# EAGLE board matrix_io_stencil (EAGLE 9.5.2), part 1 of 3
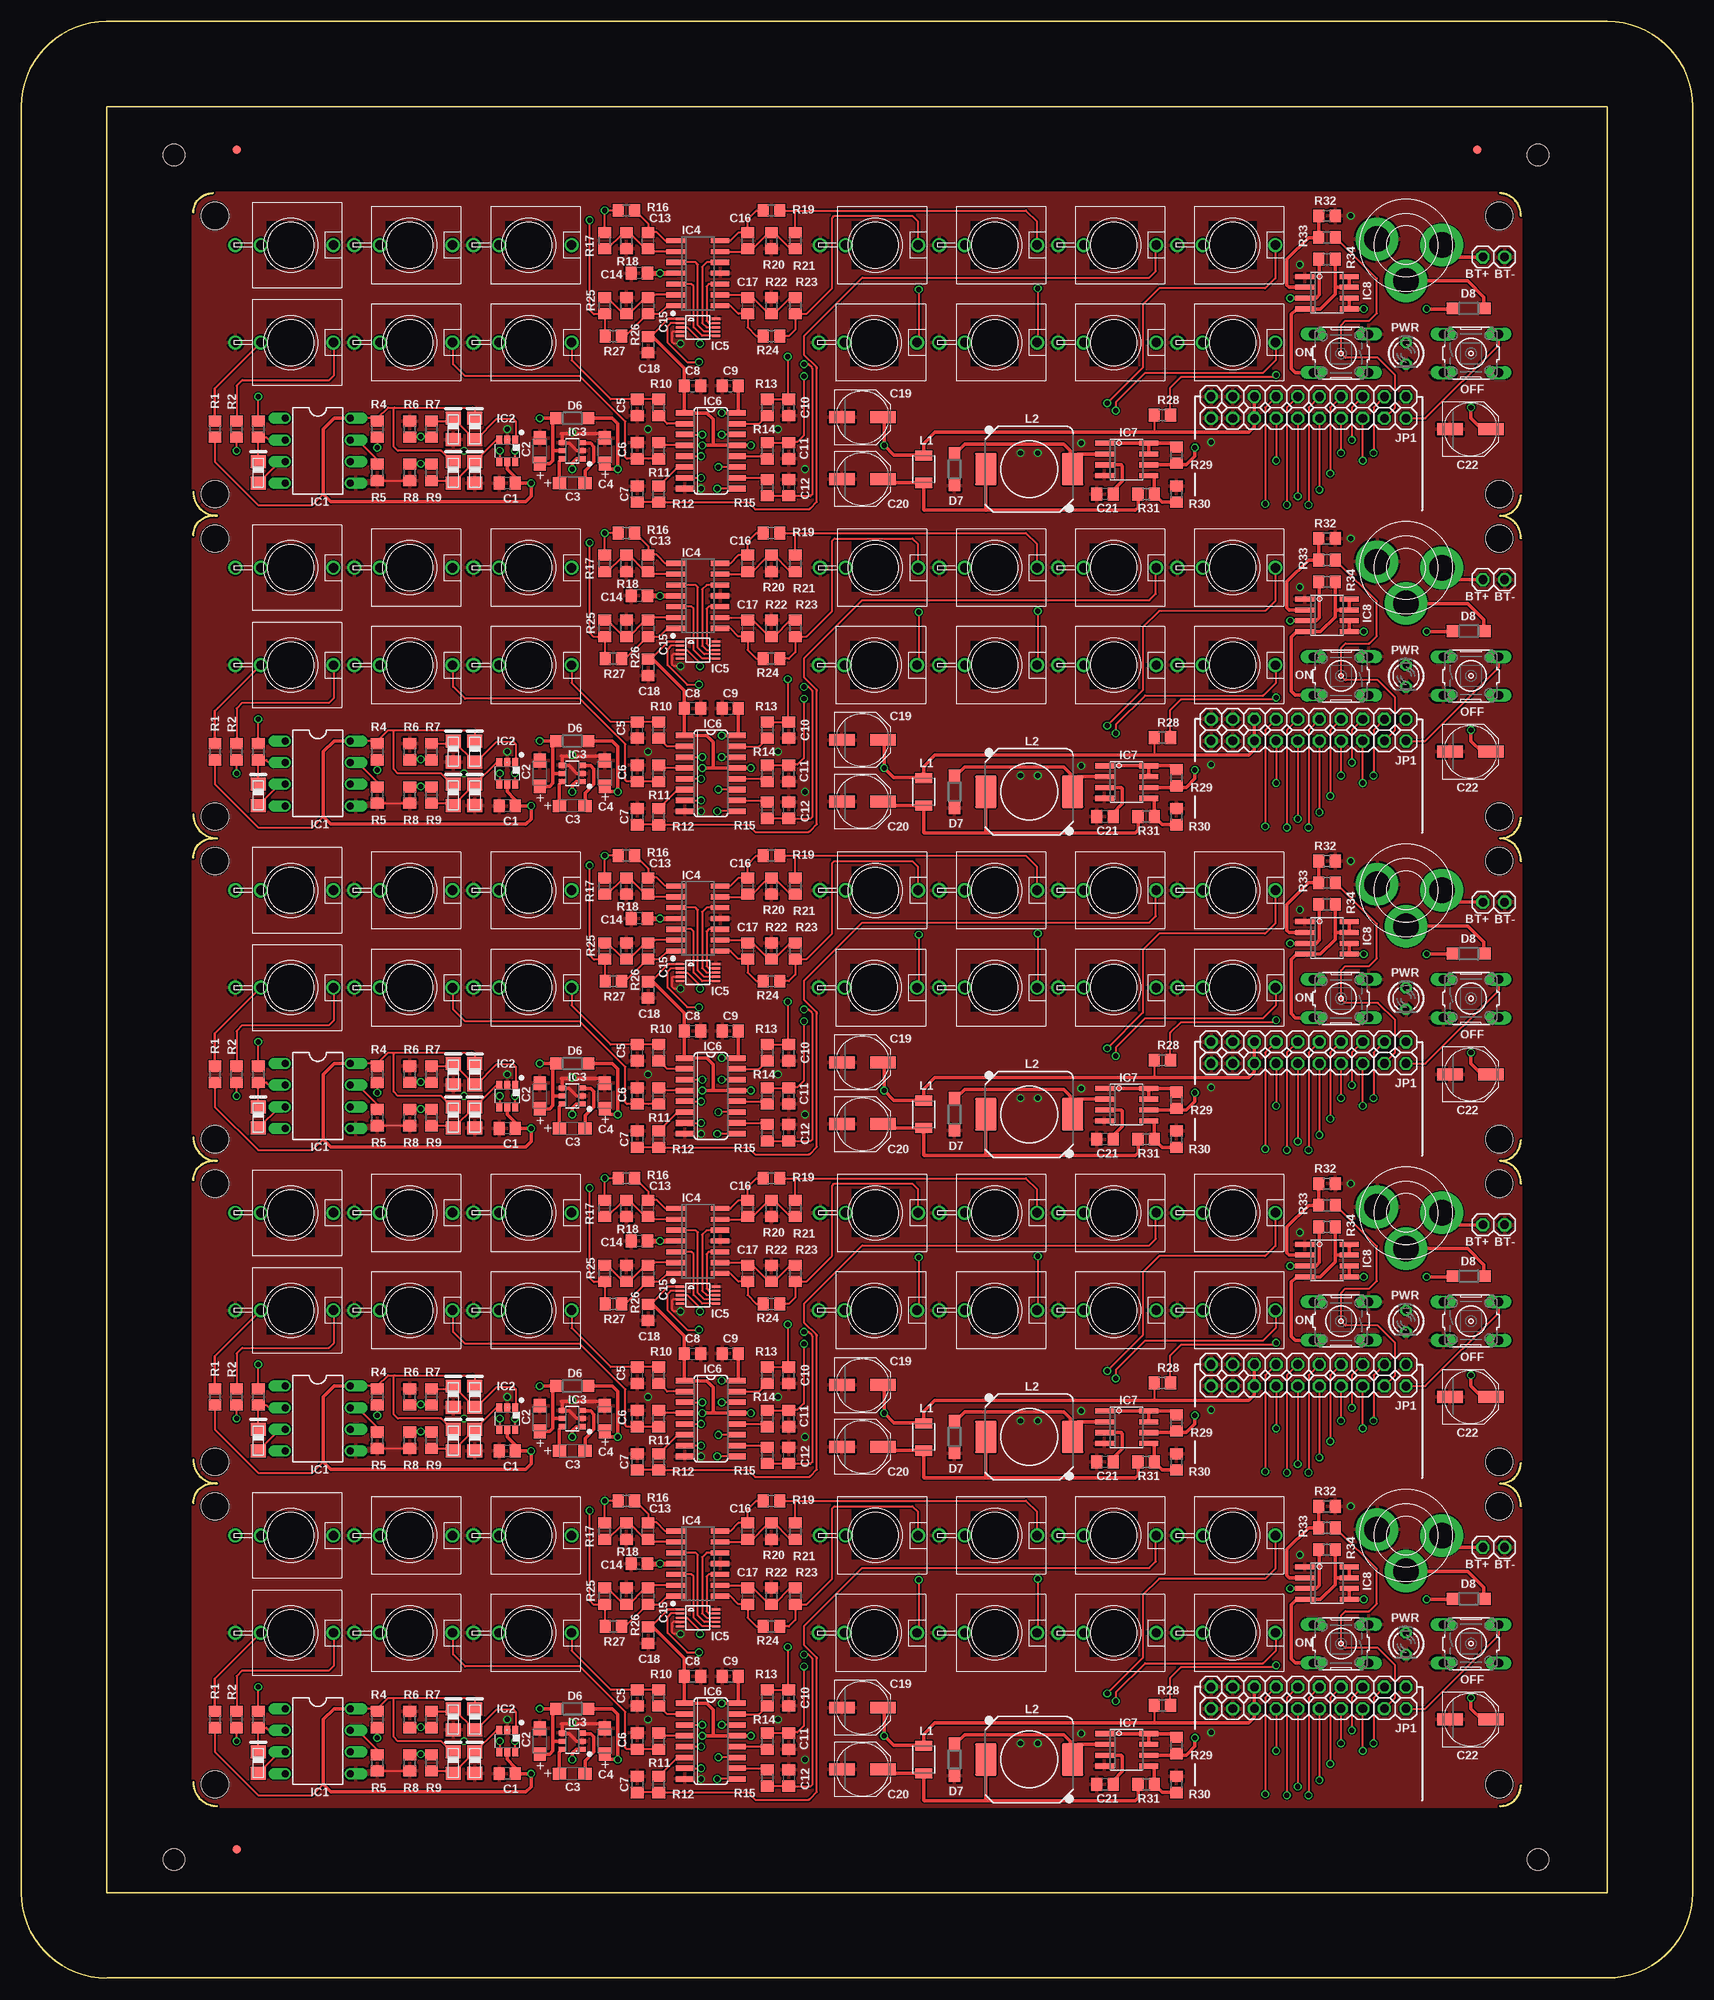
[diagram p0: board, top side]
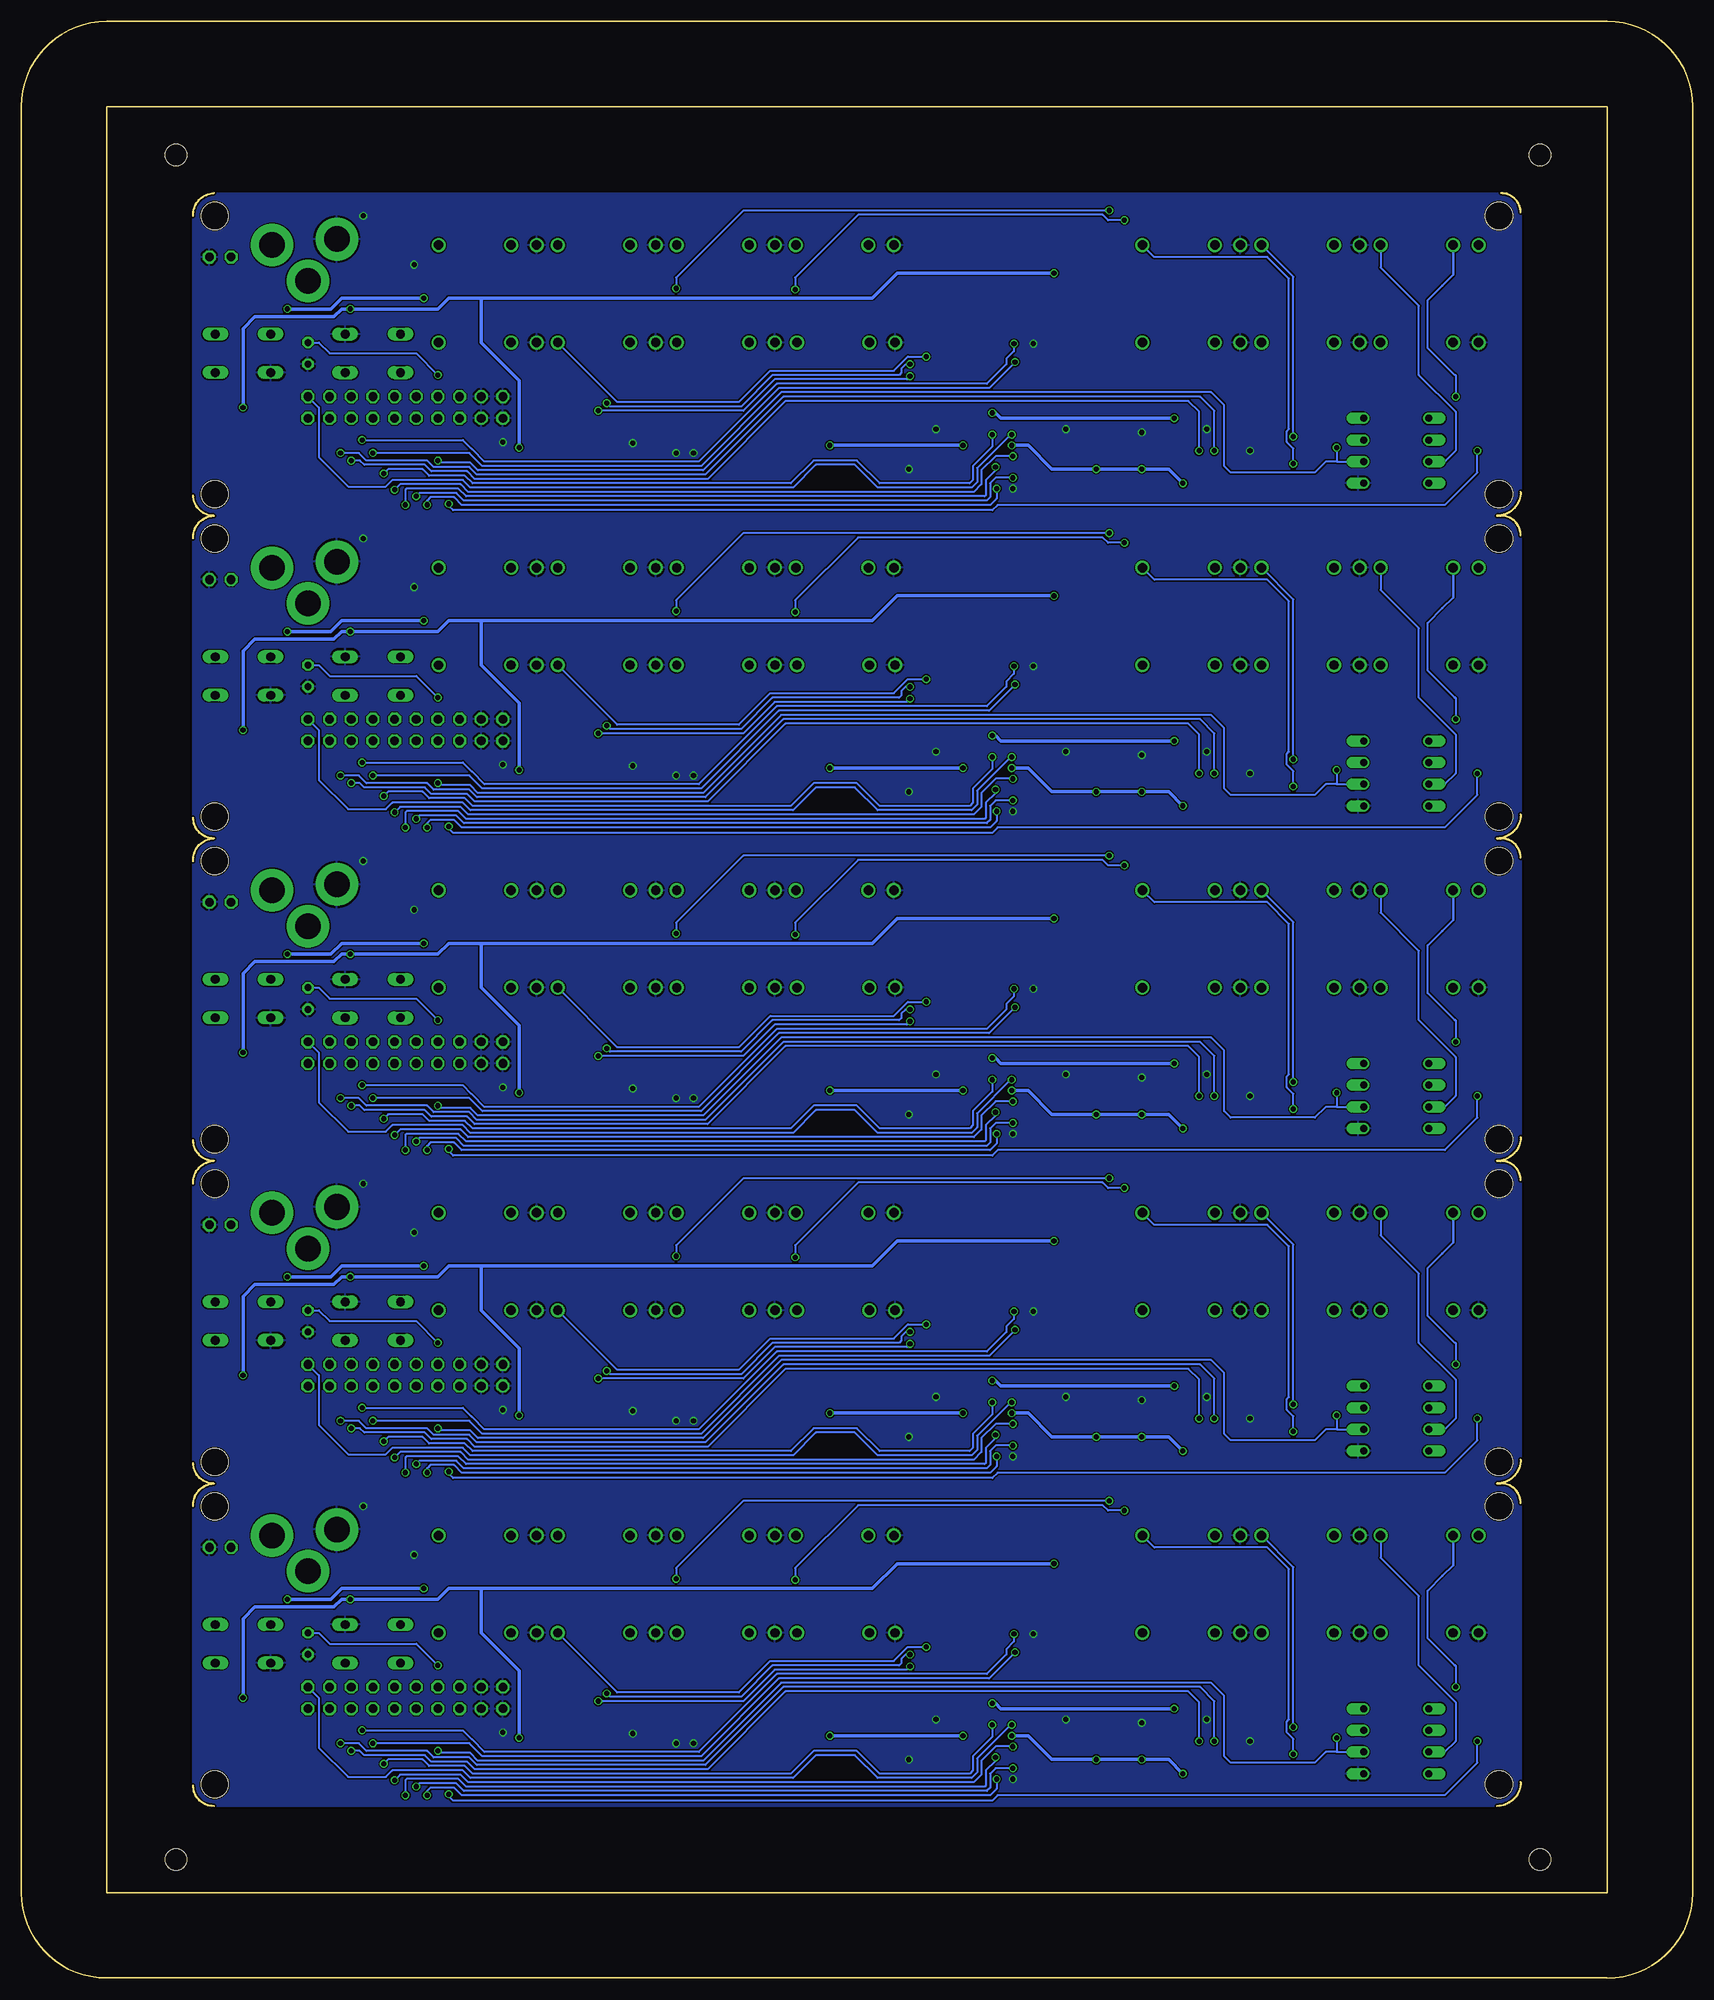
[diagram p1: board, bottom side, seen from below]

Size 196.03 x 229.58 mm. Coordinates in mm from the lower left corner, seen from the top.
Outline: 20.17,22.98 arc90 22.96,20.19
Outline: 173.46,20.19 arc90 175.87,22.6
Outline: 175.87,55.37 arc90 173.46,58.04 arc90 175.87,60.45
Outline: 20.17,55.75 arc-90 22.46,58.04 22.96,58.04 arc-90 20.17,60.83
Outline: 175.87,93.22 arc90 173.46,95.88 arc90 175.87,98.3
Outline: 20.17,93.6 arc-90 22.46,95.88 22.96,95.88 arc-90 20.17,98.68
Outline: 175.87,131.06 arc90 173.46,133.73 arc90 175.87,136.14
Outline: 20.17,131.44 arc-90 22.46,133.73 22.96,133.73 arc-90 20.17,136.52
Outline: 175.87,168.91 arc90 173.46,171.57 arc90 175.87,173.99
Outline: 20.17,169.29 arc-90 22.46,171.57 22.96,171.57 arc-90 20.17,174.37
Outline: 175.87,206.75 arc90 173.46,209.42
Outline: 20.17,207.13 arc-90 22.46,209.42
Outline: 196.03,219.58 196.03,10.03
Outline: 10.01,0.03 186.03,0.03
Outline: 10.01,229.58 186.03,229.58
Outline: 0.01,219.58 0.01,10.03
Outline: 0,219.59 0.01,219.6 arc-90 9.99,229.58
Outline: 186.04,229.58 arc-90 196.02,219.6
Outline: 196.03,10.01 arc-90 186.05,0.03
Outline: 9.99,0 arc-90 0.01,9.98
Outline: 10.01,10.03 186.03,10.03 186.03,219.58 10.01,219.58 10.01,10.03
Copper layers (1*16): Top 0.035mm / dielectric 1.5mm / Bottom 0.035mm
Design rules "hackvana": minimum track width 6mil, minimum drill 0.3mm, track to track 6mil, track to pad 9mil, pad to pad 6mil, via to via 6mil, smd to smd 0mil, copper to edge 6mil, drill to drill 6mil, minimum pad ring 10mil, minimum via ring 6mil, stop-mask expansion 2mil, vias tented up to drill 100mil, thermal gap 10mil
Holes 3.2 mm at 22.71,22.73 173.33,22.73 22.71,55.37 173.33,55.37 22.71,60.58 173.33,60.58 22.71,93.22 173.33,93.22 22.71,98.42 173.33,98.42 22.71,131.06 173.33,131.06 22.71,136.27 173.33,136.27 22.71,168.91 173.33,168.91 22.71,174.11 173.33,174.11 22.71,206.75 173.33,206.75
Holes 2.54 mm at 17.9,213.92 177.9,213.92 177.9,13.92 17.9,13.92

## Footprints (pad centres in the part's own frame; a part is rotated, then mirrored left to right if it is on the bottom)
1X01 = drill 1.016 octagon: 1 0,0
WQP-PJ301M-12_JACK = drill 1.1: P$1 0,5; P$2 0,-3.5; P$3 0,-6.5
C0805 = smd 1.3 x 1.5: 1 -0.95,0; 2 0.95,0
SMC_A = smd 1.6 x 1.4: + -1.5,0; - 1.5,0
PANASONIC_D = smd 3 x 1.4: + 2.4,0; - -2.4,0
0805DIODE = smd 1.524 x 1.778: A -1.262,-0.005; C 1.238,-0.005
SOD123 = smd 1.4 x 1.4: A 1.9,0; C -1.9,0
PWR_SOCKET_2_1MM = drill 3 pad 5: BARREL 0,4.2; NC -4.2,0; PIN 3.4,-0.7
FIDUCIAL_1MM = smd 1 x 1: 1 0,0
DIL08 = drill 0.813 offset: 1 -3.81,-3.81; 2 -1.27,-3.81; 3 1.27,-3.81; 4 3.81,-3.81; 5 3.81,3.81; 6 1.27,3.81; 7 -1.27,3.81; 8 -3.81,3.81
DBV_R-PDSO-G6 = smd 0.69 x 0.99: 1 -0.95,-1.29; 2 0,-1.29; 3 0.95,-1.29; 4 0.95,1.3; 5 0,1.3; 6 -0.95,1.3
SOT23-6 = smd 0.6 x 0.9: 1 -0.95,-1.15; 2 0,-1.15; 3 0.95,-1.15; 4 0.95,1.15; 5 0,1.15; 6 -0.95,1.15
SO14 = smd 0.6 x 2.2: 1 -3.81,-2.6; 2 -2.54,-2.6; 3 -1.27,-2.6; 4 0,-2.6; 5 1.27,-2.6; 6 2.54,-2.6; 7 3.81,-2.6; 8 3.81,2.6; 9 2.54,2.6; 10 1.27,2.6; 11 0,2.6; 12 -1.27,2.6; 13 -2.54,2.6; 14 -3.81,2.6
MSOP10 = smd 0.25 x 1: 1 -1,-2.113; 2 -0.5,-2.113; 3 0,-2.113; 4 0.5,-2.113; 5 1,-2.113; 6 1,2.113; 7 0.5,2.113; 8 0,2.113; 9 -0.5,2.113; 10 -1,2.113
SO16 = smd 0.66 x 2.032: 1 -4.445,-3.073; 2 -3.175,-3.073; 3 -1.905,-3.073; 4 -0.635,-3.073; 5 0.635,-3.073; 6 1.905,-3.073; 7 3.175,-3.073; 8 4.445,-3.073; 9 4.445,3.073; 10 3.175,3.073; 11 1.905,3.073; 12 0.635,3.073; 13 -0.635,3.073; 14 -1.905,3.073; 15 -3.175,3.073; 16 -4.445,3.073
SOIC8 = smd 0.6 x 2.2: 1 -1.905,-2.6; 2 -0.635,-2.6; 3 0.635,-2.6; 4 1.905,-2.6; 5 1.905,2.6; 6 0.635,2.6; 7 -0.635,2.6; 8 -1.905,2.6
1210 = smd 1.2 x 2: 1 -1.6,0; 2 1.6,0
DR1030 = smd 3.81 x 2.54: 1 0,5.085; 2 0,-5.085
WQP-PJ301M-ST = drill 1.1: P$1 0,5; P$2 0,-3.5; P$3 0,-6.5
B3F-10XX = drill 1.016 long: 1 -3.251,2.261; 2 3.251,2.261; 3 -3.251,-2.261; 4 3.251,-2.261
LED3MM = drill 0.813 octagon: A -1.27,0; K 1.27,0
R0805 = smd 1.3 x 1.5: 1 -0.95,0; 2 0.95,0

## Placement (x,y rotation side)
5V  [1X01]  144.63,34.16 0 top
5V1  [1X01]  144.63,72.01 0 top
5V2  [1X01]  144.63,109.85 0 top
5V3  [1X01]  144.63,147.7 0 top
5V4  [1X01]  144.63,185.54 0 top
5V.  [1X01]  144.63,31.62 0 top
5V.1  [1X01]  144.63,69.47 0 top
5V.2  [1X01]  144.63,107.31 0 top
5V.3  [1X01]  144.63,145.16 0 top
5V.4  [1X01]  144.63,183 0 top
AUXI  WQP-PJ301M-12_JACK  [WQP-PJ301M-12_JACK]  59.54,51.94 270 top
AUXI1  WQP-PJ301M-12_JACK  [WQP-PJ301M-12_JACK]  59.54,89.79 270 top
AUXI2  WQP-PJ301M-12_JACK  [WQP-PJ301M-12_JACK]  59.54,127.63 270 top
AUXI3  WQP-PJ301M-12_JACK  [WQP-PJ301M-12_JACK]  59.54,165.48 270 top
AUXI4  WQP-PJ301M-12_JACK  [WQP-PJ301M-12_JACK]  59.54,203.32 270 top
AUXO  WQP-PJ301M-12_JACK  [WQP-PJ301M-12_JACK]  59.54,40.51 270 top
AUXO1  WQP-PJ301M-12_JACK  [WQP-PJ301M-12_JACK]  59.54,78.36 270 top
AUXO2  WQP-PJ301M-12_JACK  [WQP-PJ301M-12_JACK]  59.54,116.2 270 top
AUXO3  WQP-PJ301M-12_JACK  [WQP-PJ301M-12_JACK]  59.54,154.05 270 top
AUXO4  WQP-PJ301M-12_JACK  [WQP-PJ301M-12_JACK]  59.54,191.89 270 top
BT+  [1X01]  171.43,50.54 0 top
BT+1  [1X01]  171.43,88.39 0 top
BT+2  [1X01]  171.43,126.23 0 top
BT+3  [1X01]  171.43,164.08 0 top
BT+4  [1X01]  171.43,201.93 0 top
BT-  [1X01]  173.97,50.54 0 top
BT-1  [1X01]  173.97,88.39 0 top
BT-2  [1X01]  173.97,126.23 0 top
BT-3  [1X01]  173.97,164.08 0 top
BT-4  [1X01]  173.97,201.93 0 top
C1  100n  [C0805]  57,24 180 top
C2  10u  [SMC_A]  60.81,27.81 90 top
C3  10u  [SMC_A]  64.62,24 0 top
C4  10u  [SMC_A]  68.43,27.81 90 top
C5  10n  [C0805]  72.24,32.89 90 top
C6  10n  [C0805]  72.24,27.81 270 top
C7  10n  [C0805]  72.24,22.73 270 top
C8  100n  [C0805]  78.72,35.43 0 top
C9  100n  [C0805]  83.16,35.43 0 top
C10  10n  [C0805]  90.02,32.89 90 top
C11  10n  [C0805]  90.02,27.81 90 top
C12  10n  [C0805]  90.02,23.49 270 top
C13  20p  [C0805]  73.51,52.45 90 top
C14  [C0805]  72.49,48.64 180 top
C15  [C0805]  73.51,44.83 270 top
C16  [C0805]  85.19,52.45 90 top
C17  [C0805]  85.19,44.83 270 top
C18  100n  [C0805]  73.51,40.26 270 top
C19  [PANASONIC_D]  98.66,31.75 0 top
C20  [PANASONIC_D]  98.66,24.51 0 top
C21  470p  [C0805]  127.1,22.73 180 top
C22  [PANASONIC_D]  169.97,30.35 0 top
C23  [C0805]  72.49,86.48 180 top
C24  100n  [C0805]  73.51,78.1 270 top
C25  [PANASONIC_D]  169.97,68.2 0 top
C26  470p  [C0805]  127.1,60.58 180 top
C27  [PANASONIC_D]  98.66,62.35 0 top
C28  10u  [SMC_A]  64.62,61.85 0 top
C29  10u  [SMC_A]  60.81,65.66 90 top
C30  10u  [SMC_A]  68.43,65.66 90 top
C31  100n  [C0805]  78.72,73.28 0 top
C32  100n  [C0805]  83.16,73.28 0 top
C33  [PANASONIC_D]  98.66,69.59 0 top
C34  100n  [C0805]  57,61.85 180 top
C35  20p  [C0805]  73.51,90.29 90 top
C36  [C0805]  73.51,82.67 270 top
C37  [C0805]  85.19,82.67 270 top
C38  [C0805]  85.19,90.29 90 top
C39  10n  [C0805]  72.24,70.74 90 top
C40  10n  [C0805]  72.24,65.66 270 top
C41  10n  [C0805]  72.24,60.58 270 top
C42  10n  [C0805]  90.02,65.66 90 top
C43  10n  [C0805]  90.02,70.74 90 top
C44  10n  [C0805]  90.02,61.34 270 top
C45  [C0805]  72.49,124.33 180 top
C46  100n  [C0805]  73.51,115.95 270 top
C47  [PANASONIC_D]  169.97,106.04 0 top
C48  470p  [C0805]  127.1,98.42 180 top
C49  [PANASONIC_D]  98.66,100.2 0 top
C50  10u  [SMC_A]  64.62,99.69 0 top
C51  10u  [SMC_A]  60.81,103.5 90 top
C52  10u  [SMC_A]  68.43,103.5 90 top
C53  100n  [C0805]  78.72,111.12 0 top
C54  100n  [C0805]  83.16,111.12 0 top
C55  [PANASONIC_D]  98.66,107.44 0 top
C56  100n  [C0805]  57,99.69 180 top
C57  20p  [C0805]  73.51,128.14 90 top
C58  [C0805]  73.51,120.52 270 top
C59  [C0805]  85.19,120.52 270 top
C60  [C0805]  85.19,128.14 90 top
C61  10n  [C0805]  72.24,108.58 90 top
C62  10n  [C0805]  72.24,103.5 270 top
C63  10n  [C0805]  72.24,98.42 270 top
C64  10n  [C0805]  90.02,103.5 90 top
C65  10n  [C0805]  90.02,108.58 90 top
C66  10n  [C0805]  90.02,99.18 270 top
C67  [C0805]  72.49,162.18 180 top
C68  100n  [C0805]  73.51,153.79 270 top
C69  [PANASONIC_D]  169.97,143.89 0 top
C70  470p  [C0805]  127.1,136.27 180 top
C71  [PANASONIC_D]  98.66,138.05 0 top
C72  10u  [SMC_A]  64.62,137.54 0 top
C73  10u  [SMC_A]  60.81,141.35 90 top
C74  10u  [SMC_A]  68.43,141.35 90 top
C75  100n  [C0805]  78.72,148.97 0 top
C76  100n  [C0805]  83.16,148.97 0 top
C77  [PANASONIC_D]  98.66,145.28 0 top
C78  100n  [C0805]  57,137.54 180 top
C79  20p  [C0805]  73.51,165.99 90 top
C80  [C0805]  73.51,158.37 270 top
C81  [C0805]  85.19,158.37 270 top
C82  [C0805]  85.19,165.99 90 top
C83  10n  [C0805]  72.24,146.43 90 top
C84  10n  [C0805]  72.24,141.35 270 top
C85  10n  [C0805]  72.24,136.27 270 top
C86  10n  [C0805]  90.02,141.35 90 top
C87  10n  [C0805]  90.02,146.43 90 top
C88  10n  [C0805]  90.02,137.03 270 top
C89  [C0805]  72.49,200.02 180 top
C90  100n  [C0805]  73.51,191.64 270 top
C91  [PANASONIC_D]  169.97,181.73 0 top
C92  470p  [C0805]  127.1,174.11 180 top
C93  [PANASONIC_D]  98.66,175.89 0 top
C94  10u  [SMC_A]  64.62,175.38 0 top
C95  10u  [SMC_A]  60.81,179.19 90 top
C96  10u  [SMC_A]  68.43,179.19 90 top
C97  100n  [C0805]  78.72,186.81 0 top
C98  100n  [C0805]  83.16,186.81 0 top
C99  [PANASONIC_D]  98.66,183.13 0 top
C100  100n  [C0805]  57,175.38 180 top
C101  20p  [C0805]  73.51,203.83 90 top
C102  [C0805]  73.51,196.21 270 top
C103  [C0805]  85.19,196.21 270 top
C104  [C0805]  85.19,203.83 90 top
C105  10n  [C0805]  72.24,184.27 90 top
C106  10n  [C0805]  72.24,179.19 270 top
C107  10n  [C0805]  72.24,174.11 270 top
C108  10n  [C0805]  90.02,179.19 90 top
C109  10n  [C0805]  90.02,184.27 90 top
C110  10n  [C0805]  90.02,174.88 270 top
CKI  WQP-PJ301M-12_JACK  [WQP-PJ301M-12_JACK]  45.57,51.94 270 top
CKI1  WQP-PJ301M-12_JACK  [WQP-PJ301M-12_JACK]  45.57,89.79 270 top
CKI2  WQP-PJ301M-12_JACK  [WQP-PJ301M-12_JACK]  45.57,127.63 270 top
CKI3  WQP-PJ301M-12_JACK  [WQP-PJ301M-12_JACK]  45.57,165.48 270 top
CKI4  WQP-PJ301M-12_JACK  [WQP-PJ301M-12_JACK]  45.57,203.32 270 top
CKO  WQP-PJ301M-12_JACK  [WQP-PJ301M-12_JACK]  45.57,40.51 270 top
CKO1  WQP-PJ301M-12_JACK  [WQP-PJ301M-12_JACK]  45.57,78.36 270 top
CKO2  WQP-PJ301M-12_JACK  [WQP-PJ301M-12_JACK]  45.57,116.2 270 top
CKO3  WQP-PJ301M-12_JACK  [WQP-PJ301M-12_JACK]  45.57,154.05 270 top
CKO4  WQP-PJ301M-12_JACK  [WQP-PJ301M-12_JACK]  45.57,191.89 270 top
CKOUT  [1X01]  162.41,34.16 90 top
CKOUT1  [1X01]  162.41,72.01 90 top
CKOUT2  [1X01]  162.41,109.85 90 top
CKOUT3  [1X01]  162.41,147.7 90 top
CKOUT4  [1X01]  162.41,185.54 90 top
CLKIN  [1X01]  157.33,31.62 90 top
CLKIN1  [1X01]  157.33,69.47 90 top
CLKIN2  [1X01]  157.33,107.31 90 top
CLKIN3  [1X01]  157.33,145.16 90 top
CLKIN4  [1X01]  157.33,183 90 top
CVA  WQP-PJ301M-12_JACK  [WQP-PJ301M-12_JACK]  100.18,51.94 270 top
CVA1  WQP-PJ301M-12_JACK  [WQP-PJ301M-12_JACK]  100.18,89.79 270 top
CVA2  WQP-PJ301M-12_JACK  [WQP-PJ301M-12_JACK]  100.18,127.63 270 top
CVA3  WQP-PJ301M-12_JACK  [WQP-PJ301M-12_JACK]  100.18,165.48 270 top
CVA4  WQP-PJ301M-12_JACK  [WQP-PJ301M-12_JACK]  100.18,203.32 270 top
CVB  WQP-PJ301M-12_JACK  [WQP-PJ301M-12_JACK]  114.15,51.94 270 top
CVB1  WQP-PJ301M-12_JACK  [WQP-PJ301M-12_JACK]  114.15,89.79 270 top
CVB2  WQP-PJ301M-12_JACK  [WQP-PJ301M-12_JACK]  114.15,127.63 270 top
CVB3  WQP-PJ301M-12_JACK  [WQP-PJ301M-12_JACK]  114.15,165.48 270 top
CVB4  WQP-PJ301M-12_JACK  [WQP-PJ301M-12_JACK]  114.15,203.32 270 top
CVC  WQP-PJ301M-12_JACK  [WQP-PJ301M-12_JACK]  114.15,40.51 270 top
CVC1  WQP-PJ301M-12_JACK  [WQP-PJ301M-12_JACK]  114.15,78.36 270 top
CVC2  WQP-PJ301M-12_JACK  [WQP-PJ301M-12_JACK]  114.15,116.2 270 top
CVC3  WQP-PJ301M-12_JACK  [WQP-PJ301M-12_JACK]  114.15,154.05 270 top
CVC4  WQP-PJ301M-12_JACK  [WQP-PJ301M-12_JACK]  114.15,191.89 270 top
CVD  WQP-PJ301M-12_JACK  [WQP-PJ301M-12_JACK]  100.05,40.51 270 top
CVD1  WQP-PJ301M-12_JACK  [WQP-PJ301M-12_JACK]  100.05,78.36 270 top
CVD2  WQP-PJ301M-12_JACK  [WQP-PJ301M-12_JACK]  100.05,116.2 270 top
CVD3  WQP-PJ301M-12_JACK  [WQP-PJ301M-12_JACK]  100.05,154.05 270 top
CVD4  WQP-PJ301M-12_JACK  [WQP-PJ301M-12_JACK]  100.05,191.89 270 top
D1  0805DIODE  [0805DIODE]  27.79,25.27 270 top
D2  0805DIODE  [0805DIODE]  50.65,30.35 270 top
D3  0805DIODE  [0805DIODE]  53.19,30.35 270 top
D4  0805DIODE  [0805DIODE]  50.65,25.27 270 top
D5  0805DIODE  [0805DIODE]  53.19,25.27 270 top
D6  MBR0520LT  [SOD123]  64.62,31.62 0 top
D7  MBR0520LT  [SOD123]  109.45,25.65 270 top
D8  MBR0520LT  [SOD123]  169.78,44.51 0 top
D9  0805DIODE  [0805DIODE]  27.79,63.12 270 top
D10  MBR0520LT  [SOD123]  64.62,69.47 0 top
D11  0805DIODE  [0805DIODE]  53.19,68.2 270 top
D12  0805DIODE  [0805DIODE]  50.65,68.2 270 top
D13  MBR0520LT  [SOD123]  169.78,82.36 0 top
D14  0805DIODE  [0805DIODE]  50.65,63.12 270 top
D15  0805DIODE  [0805DIODE]  53.19,63.12 270 top
D16  MBR0520LT  [SOD123]  109.45,63.5 270 top
D17  0805DIODE  [0805DIODE]  27.79,100.96 270 top
D18  MBR0520LT  [SOD123]  64.62,107.31 0 top
D19  0805DIODE  [0805DIODE]  53.19,106.04 270 top
D20  0805DIODE  [0805DIODE]  50.65,106.04 270 top
D21  MBR0520LT  [SOD123]  169.78,120.2 0 top
D22  0805DIODE  [0805DIODE]  50.65,100.96 270 top
D23  0805DIODE  [0805DIODE]  53.19,100.96 270 top
D24  MBR0520LT  [SOD123]  109.45,101.34 270 top
D25  0805DIODE  [0805DIODE]  27.79,138.81 270 top
D26  MBR0520LT  [SOD123]  64.62,145.16 0 top
D27  0805DIODE  [0805DIODE]  53.19,143.89 270 top
D28  0805DIODE  [0805DIODE]  50.65,143.89 270 top
D29  MBR0520LT  [SOD123]  169.78,158.05 0 top
D30  0805DIODE  [0805DIODE]  50.65,138.81 270 top
D31  0805DIODE  [0805DIODE]  53.19,138.81 270 top
D32  MBR0520LT  [SOD123]  109.45,139.19 270 top
D33  0805DIODE  [0805DIODE]  27.79,176.65 270 top
D34  MBR0520LT  [SOD123]  64.62,183 0 top
D35  0805DIODE  [0805DIODE]  53.19,181.73 270 top
D36  0805DIODE  [0805DIODE]  50.65,181.73 270 top
D37  MBR0520LT  [SOD123]  169.78,195.89 0 top
D38  0805DIODE  [0805DIODE]  50.65,176.65 270 top
D39  0805DIODE  [0805DIODE]  53.19,176.65 270 top
D40  MBR0520LT  [SOD123]  109.45,177.04 270 top
DC  PWR_SOCKET_2_1MM  [PWR_SOCKET_2_1MM]  162.41,51.94 180 top
DC1  PWR_SOCKET_2_1MM  [PWR_SOCKET_2_1MM]  162.41,89.79 180 top
DC2  PWR_SOCKET_2_1MM  [PWR_SOCKET_2_1MM]  162.41,127.63 180 top
DC3  PWR_SOCKET_2_1MM  [PWR_SOCKET_2_1MM]  162.41,165.48 180 top
DC4  PWR_SOCKET_2_1MM  [PWR_SOCKET_2_1MM]  162.41,203.32 180 top
E$1  [FIDUCIAL_1MM]  25.25,214.5 0 top
E$2  [FIDUCIAL_1MM]  170.79,214.5 0 top
E$3  [FIDUCIAL_1MM]  25.25,15.11 0 top
G1  [1X01]  149.71,31.62 90 top
G2  [1X01]  152.25,31.62 90 top
G3  [1X01]  154.79,34.16 90 top
G4  [1X01]  152.25,34.16 90 top
G5  [1X01]  154.79,72.01 90 top
G6  [1X01]  152.25,69.47 90 top
G7  [1X01]  149.71,69.47 90 top
G8  [1X01]  152.25,72.01 90 top
G9  [1X01]  154.79,109.85 90 top
G10  [1X01]  152.25,107.31 90 top
G11  [1X01]  149.71,107.31 90 top
G12  [1X01]  152.25,109.85 90 top
G13  [1X01]  154.79,147.7 90 top
G14  [1X01]  152.25,145.16 90 top
G15  [1X01]  149.71,145.16 90 top
G16  [1X01]  152.25,147.7 90 top
G17  [1X01]  154.79,185.54 90 top
G18  [1X01]  152.25,183 90 top
G19  [1X01]  149.71,183 90 top
G20  [1X01]  152.25,185.54 90 top
GD1  [1X01]  142.09,34.16 90 top
GD2  [1X01]  142.09,31.62 0 top
GD3  [1X01]  139.55,31.62 0 top
GD4  [1X01]  139.55,34.16 0 top
GD5  [1X01]  142.09,69.47 0 top
GD6  [1X01]  142.09,72.01 90 top
GD7  [1X01]  139.55,69.47 0 top
GD8  [1X01]  139.55,72.01 0 top
GD9  [1X01]  142.09,107.31 0 top
GD10  [1X01]  142.09,109.85 90 top
GD11  [1X01]  139.55,107.31 0 top
GD12  [1X01]  139.55,109.85 0 top
GD13  [1X01]  142.09,145.16 0 top
GD14  [1X01]  142.09,147.7 90 top
GD15  [1X01]  139.55,145.16 0 top
GD16  [1X01]  139.55,147.7 0 top
GD17  [1X01]  142.09,183 0 top
GD18  [1X01]  142.09,185.54 90 top
GD19  [1X01]  139.55,183 0 top
GD20  [1X01]  139.55,185.54 0 top
GT1  WQP-PJ301M-12_JACK  [WQP-PJ301M-12_JACK]  128.12,51.94 270 top
GT2  WQP-PJ301M-12_JACK  [WQP-PJ301M-12_JACK]  142.09,51.94 270 top
GT3  WQP-PJ301M-12_JACK  [WQP-PJ301M-12_JACK]  128.12,40.51 270 top
GT4  WQP-PJ301M-12_JACK  [WQP-PJ301M-12_JACK]  142.09,40.51 270 top
GT5  WQP-PJ301M-12_JACK  [WQP-PJ301M-12_JACK]  142.09,89.79 270 top
GT6  WQP-PJ301M-12_JACK  [WQP-PJ301M-12_JACK]  128.12,89.79 270 top
GT7  WQP-PJ301M-12_JACK  [WQP-PJ301M-12_JACK]  142.09,78.36 270 top
GT8  WQP-PJ301M-12_JACK  [WQP-PJ301M-12_JACK]  128.12,78.36 270 top
GT9  WQP-PJ301M-12_JACK  [WQP-PJ301M-12_JACK]  142.09,127.63 270 top
GT10  WQP-PJ301M-12_JACK  [WQP-PJ301M-12_JACK]  128.12,127.63 270 top
GT11  WQP-PJ301M-12_JACK  [WQP-PJ301M-12_JACK]  142.09,116.2 270 top
GT12  WQP-PJ301M-12_JACK  [WQP-PJ301M-12_JACK]  128.12,116.2 270 top
GT13  WQP-PJ301M-12_JACK  [WQP-PJ301M-12_JACK]  142.09,165.48 270 top
GT14  WQP-PJ301M-12_JACK  [WQP-PJ301M-12_JACK]  128.12,165.48 270 top
GT15  WQP-PJ301M-12_JACK  [WQP-PJ301M-12_JACK]  142.09,154.05 270 top
GT16  WQP-PJ301M-12_JACK  [WQP-PJ301M-12_JACK]  128.12,154.05 270 top
GT17  WQP-PJ301M-12_JACK  [WQP-PJ301M-12_JACK]  142.09,203.32 270 top
GT18  WQP-PJ301M-12_JACK  [WQP-PJ301M-12_JACK]  128.12,203.32 270 top
GT19  WQP-PJ301M-12_JACK  [WQP-PJ301M-12_JACK]  142.09,191.89 270 top
GT20  WQP-PJ301M-12_JACK  [WQP-PJ301M-12_JACK]  128.12,191.89 270 top
IC1  6N138  [DIL08]  34.77,27.81 270 top
IC2  SN74LVC2G14  [DBV_R-PDSO-G6]  57,27.81 180 top
IC3  LM27675M5_CHARGEPUMP  [SOT23-6]  64.62,27.81 90 top
IC4  LM324D  [SO14]  79.35,48.64 270 top
IC5  MCP4728_QUAD_DAC  [MSOP10]  79.35,42.29 270 top
IC6  4504D  [SO16]  80.88,27.81 270 top
IC7  SP34063A_BOOST_REG  [SOIC8]  129.64,26.79 270 top
IC8  FDS8958B  [SOIC8]  153.14,46.35 270 top
IC9  LM324D  [SO14]  79.35,86.48 270 top
IC10  6N138  [DIL08]  34.77,65.66 270 top
IC11  MCP4728_QUAD_DAC  [MSOP10]  79.35,80.13 270 top
IC12  SP34063A_BOOST_REG  [SOIC8]  129.64,64.64 270 top
IC13  LM27675M5_CHARGEPUMP  [SOT23-6]  64.62,65.66 90 top
IC14  4504D  [SO16]  80.88,65.66 270 top
IC15  FDS8958B  [SOIC8]  153.14,84.2 270 top
IC16  SN74LVC2G14  [DBV_R-PDSO-G6]  57,65.66 180 top
IC17  LM324D  [SO14]  79.35,124.33 270 top
IC18  6N138  [DIL08]  34.77,103.5 270 top
IC19  MCP4728_QUAD_DAC  [MSOP10]  79.35,117.98 270 top
IC20  SP34063A_BOOST_REG  [SOIC8]  129.64,102.49 270 top
IC21  LM27675M5_CHARGEPUMP  [SOT23-6]  64.62,103.5 90 top
IC22  4504D  [SO16]  80.88,103.5 270 top
IC23  FDS8958B  [SOIC8]  153.14,122.04 270 top
IC24  SN74LVC2G14  [DBV_R-PDSO-G6]  57,103.5 180 top
IC25  LM324D  [SO14]  79.35,162.18 270 top
IC26  6N138  [DIL08]  34.77,141.35 270 top
IC27  MCP4728_QUAD_DAC  [MSOP10]  79.35,155.83 270 top
IC28  SP34063A_BOOST_REG  [SOIC8]  129.64,140.33 270 top
IC29  LM27675M5_CHARGEPUMP  [SOT23-6]  64.62,141.35 90 top
IC30  4504D  [SO16]  80.88,141.35 270 top
IC31  FDS8958B  [SOIC8]  153.14,159.89 270 top
IC32  SN74LVC2G14  [DBV_R-PDSO-G6]  57,141.35 180 top
IC33  LM324D  [SO14]  79.35,200.02 270 top
IC34  6N138  [DIL08]  34.77,179.19 270 top
IC35  MCP4728_QUAD_DAC  [MSOP10]  79.35,193.67 270 top
IC36  SP34063A_BOOST_REG  [SOIC8]  129.64,178.18 270 top
IC37  LM27675M5_CHARGEPUMP  [SOT23-6]  64.62,179.19 90 top
IC38  4504D  [SO16]  80.88,179.19 270 top
IC39  FDS8958B  [SOIC8]  153.14,197.74 270 top
IC40  SN74LVC2G14  [DBV_R-PDSO-G6]  57,179.19 180 top
L1  [1210]  105.83,25.65 90 top
L2  [DR1030]  118.21,25.65 90 top
L3  [1210]  105.83,63.5 90 top
L4  [DR1030]  118.21,63.5 90 top
L5  [1210]  105.83,101.34 90 top
L6  [DR1030]  118.21,101.34 90 top
L7  [1210]  105.83,139.19 90 top
L8  [DR1030]  118.21,139.19 90 top
L9  [1210]  105.83,177.04 90 top
L10  [DR1030]  118.21,177.04 90 top
MIDIIN  THONKICONN_STEREO  [WQP-PJ301M-ST]  31.6,51.94 270 top
MIDIIN1  THONKICONN_STEREO  [WQP-PJ301M-ST]  31.6,89.79 270 top
MIDIIN2  THONKICONN_STEREO  [WQP-PJ301M-ST]  31.6,127.63 270 top
MIDIIN3  THONKICONN_STEREO  [WQP-PJ301M-ST]  31.6,165.48 270 top
MIDIIN4  THONKICONN_STEREO  [WQP-PJ301M-ST]  31.6,203.32 270 top
MIDIOUT  THONKICONN_STEREO  [WQP-PJ301M-ST]  31.6,40.51 270 top
MIDIOUT1  THONKICONN_STEREO  [WQP-PJ301M-ST]  31.6,78.36 270 top
MIDIOUT2  THONKICONN_STEREO  [WQP-PJ301M-ST]  31.6,116.2 270 top
MIDIOUT3  THONKICONN_STEREO  [WQP-PJ301M-ST]  31.6,154.05 270 top
MIDIOUT4  THONKICONN_STEREO  [WQP-PJ301M-ST]  31.6,191.89 270 top
OFF  [B3F-10XX]  170.03,39.24 0 top
OFF1  [B3F-10XX]  170.03,77.09 0 top
OFF2  [B3F-10XX]  170.03,114.93 0 top
OFF3  [B3F-10XX]  170.03,152.78 0 top
OFF4  [B3F-10XX]  170.03,190.62 0 top
OFFSW  [1X01]  162.41,31.62 0 top
OFFSW1  [1X01]  162.41,69.47 0 top
OFFSW2  [1X01]  162.41,107.31 0 top
OFFSW3  [1X01]  162.41,145.16 0 top
OFFSW4  [1X01]  162.41,183 0 top
ON  [B3F-10XX]  154.79,39.24 180 top
ON1  [B3F-10XX]  154.79,77.09 180 top
ON2  [B3F-10XX]  154.79,114.93 180 top
ON3  [B3F-10XX]  154.79,152.78 180 top
ON4  [B3F-10XX]  154.79,190.62 180 top
PWR  [LED3MM]  162.41,39.24 270 top
PWR1  [LED3MM]  162.41,77.09 270 top
PWR2  [LED3MM]  162.41,114.93 270 top
PWR3  [LED3MM]  162.41,152.78 270 top
PWR4  [LED3MM]  162.41,190.62 270 top
PWRCTL  [1X01]  159.87,31.62 90 top
PWRCTL1  [1X01]  159.87,69.47 90 top
PWRCTL2  [1X01]  159.87,107.31 90 top
PWRCTL3  [1X01]  159.87,145.16 90 top
PWRCTL4  [1X01]  159.87,183 90 top
R1  220  [R0805]  22.71,30.35 270 top
R2  220  [R0805]  25.25,30.35 270 top
R3  220  [R0805]  27.79,30.35 270 top
R4  1k8  [R0805]  41.76,30.35 90 top
R5  1k8  [R0805]  41.76,25.27 270 top
R6  100k  [R0805]  45.57,30.35 270 top
R7  1k  [R0805]  48.11,30.35 270 top
R8  100k  [R0805]  45.57,25.27 90 top
R9  1k  [R0805]  48.11,25.27 90 top
R10  1k  [R0805]  74.78,32.89 90 top
R11  1k  [R0805]  74.78,27.81 270 top
R12  1k  [R0805]  74.78,22.73 270 top
R13  1k  [R0805]  87.48,32.89 90 top
R14  1k  [R0805]  87.48,27.81 90 top
R15  1k  [R0805]  87.48,23.49 270 top
R16  1k  [R0805]  70.97,56 180 top
R17  10k/0.1%  [R0805]  68.43,52.45 90 top
R18  10k/0.1%  [R0805]  70.97,52.45 90 top
R19  1k  [R0805]  87.99,56 0 top
R20  10k/0.1%  [R0805]  87.99,52.45 90 top
R21  10k/0.1%  [R0805]  90.78,52.45 90 top
R22  10k/0.1%  [R0805]  87.99,44.83 270 top
R23  10k/0.1%  [R0805]  90.78,44.83 270 top
R24  1k  [R0805]  87.99,41.27 0 top
R25  10k/0.1%  [R0805]  68.43,44.83 270 top
R26  10k/0.1%  [R0805]  70.97,44.83 270 top
R27  1k  [R0805]  69.45,41.27 180 top
R28  1k  [R0805]  133.84,32 0 top
R29  0r33  [R0805]  135.49,27.3 90 top
R30  1k  [R0805]  135.49,22.73 270 top
R31  3k  [R0805]  131.93,22.73 0 top
R32  10k  [R0805]  153.14,55.37 180 top
R33  1k  [R0805]  153.14,52.83 180 top
R34  10k  [R0805]  153.14,50.29 0 top
R35  220  [R0805]  27.79,68.2 270 top
R36  1k8  [R0805]  41.76,63.12 270 top
R37  1k8  [R0805]  41.76,68.2 90 top
R38  220  [R0805]  22.71,68.2 270 top
R39  220  [R0805]  25.25,68.2 270 top
R40  1k  [R0805]  70.97,93.85 180 top
R41  1k  [R0805]  69.45,79.12 180 top
R42  1k  [R0805]  87.99,79.12 0 top
R43  1k  [R0805]  87.99,93.85 0 top
R44  10k/0.1%  [R0805]  68.43,90.29 90 top
R45  10k/0.1%  [R0805]  68.43,82.67 270 top
R46  10k/0.1%  [R0805]  90.78,82.67 270 top
R47  10k/0.1%  [R0805]  90.78,90.29 90 top
R48  10k/0.1%  [R0805]  70.97,90.29 90 top
R49  10k/0.1%  [R0805]  70.97,82.67 270 top
R50  10k/0.1%  [R0805]  87.99,82.67 270 top
R51  10k/0.1%  [R0805]  87.99,90.29 90 top
R52  0r33  [R0805]  135.49,65.15 90 top
R53  1k  [R0805]  135.49,60.58 270 top
R54  3k  [R0805]  131.93,60.58 0 top
R55  1k  [R0805]  74.78,70.74 90 top
R56  1k  [R0805]  74.78,65.66 270 top
R57  1k  [R0805]  74.78,60.58 270 top
R58  1k  [R0805]  87.48,65.66 90 top
R59  1k  [R0805]  87.48,70.74 90 top
R60  1k  [R0805]  48.11,68.2 270 top
R61  1k  [R0805]  133.84,69.85 0 top
R62  10k  [R0805]  153.14,88.14 0 top
R63  1k  [R0805]  153.14,90.67 180 top
R64  10k  [R0805]  153.14,93.22 180 top
R65  100k  [R0805]  45.57,68.2 270 top
R66  1k  [R0805]  87.48,61.34 270 top
R67  1k  [R0805]  48.11,63.12 90 top
R68  100k  [R0805]  45.57,63.12 90 top
R69  220  [R0805]  27.79,106.04 270 top
R70  1k8  [R0805]  41.76,100.96 270 top
R71  1k8  [R0805]  41.76,106.04 90 top
R72  220  [R0805]  22.71,106.04 270 top
R73  220  [R0805]  25.25,106.04 270 top
R74  1k  [R0805]  70.97,131.7 180 top
R75  1k  [R0805]  69.45,116.96 180 top
R76  1k  [R0805]  87.99,116.96 0 top
R77  1k  [R0805]  87.99,131.7 0 top
R78  10k/0.1%  [R0805]  68.43,128.14 90 top
R79  10k/0.1%  [R0805]  68.43,120.52 270 top
R80  10k/0.1%  [R0805]  90.78,120.52 270 top
R81  10k/0.1%  [R0805]  90.78,128.14 90 top
R82  10k/0.1%  [R0805]  70.97,128.14 90 top
R83  10k/0.1%  [R0805]  70.97,120.52 270 top
R84  10k/0.1%  [R0805]  87.99,120.52 270 top
R85  10k/0.1%  [R0805]  87.99,128.14 90 top
R86  0r33  [R0805]  135.49,102.99 90 top
R87  1k  [R0805]  135.49,98.42 270 top
R88  3k  [R0805]  131.93,98.42 0 top
R89  1k  [R0805]  74.78,108.58 90 top
R90  1k  [R0805]  74.78,103.5 270 top
R91  1k  [R0805]  74.78,98.42 270 top
R92  1k  [R0805]  87.48,103.5 90 top
R93  1k  [R0805]  87.48,108.58 90 top
R94  1k  [R0805]  48.11,106.04 270 top
R95  1k  [R0805]  133.84,107.69 0 top
R96  10k  [R0805]  153.14,125.98 0 top
R97  1k  [R0805]  153.14,128.52 180 top
R98  10k  [R0805]  153.14,131.06 180 top
R99  100k  [R0805]  45.57,106.04 270 top
R100  1k  [R0805]  87.48,99.18 270 top
R101  1k  [R0805]  48.11,100.96 90 top
R102  100k  [R0805]  45.57,100.96 90 top
R103  220  [R0805]  27.79,143.89 270 top
R104  1k8  [R0805]  41.76,138.81 270 top
R105  1k8  [R0805]  41.76,143.89 90 top
R106  220  [R0805]  22.71,143.89 270 top
R107  220  [R0805]  25.25,143.89 270 top
R108  1k  [R0805]  70.97,169.54 180 top
R109  1k  [R0805]  69.45,154.81 180 top
R110  1k  [R0805]  87.99,154.81 0 top
R111  1k  [R0805]  87.99,169.54 0 top
R112  10k/0.1%  [R0805]  68.43,165.99 90 top
R113  10k/0.1%  [R0805]  68.43,158.37 270 top
R114  10k/0.1%  [R0805]  90.78,158.37 270 top
R115  10k/0.1%  [R0805]  90.78,165.99 90 top
R116  10k/0.1%  [R0805]  70.97,165.99 90 top
R117  10k/0.1%  [R0805]  70.97,158.37 270 top
R118  10k/0.1%  [R0805]  87.99,158.37 270 top
R119  10k/0.1%  [R0805]  87.99,165.99 90 top
R120  0r33  [R0805]  135.49,140.84 90 top
R121  1k  [R0805]  135.49,136.27 270 top
R122  3k  [R0805]  131.93,136.27 0 top
R123  1k  [R0805]  74.78,146.43 90 top
R124  1k  [R0805]  74.78,141.35 270 top
R125  1k  [R0805]  74.78,136.27 270 top
R126  1k  [R0805]  87.48,141.35 90 top
R127  1k  [R0805]  87.48,146.43 90 top
R128  1k  [R0805]  48.11,143.89 270 top
R129  1k  [R0805]  133.84,145.54 0 top
R130  10k  [R0805]  153.14,163.83 0 top
R131  1k  [R0805]  153.14,166.37 180 top
R132  10k  [R0805]  153.14,168.91 180 top
R133  100k  [R0805]  45.57,143.89 270 top
R134  1k  [R0805]  87.48,137.03 270 top
R135  1k  [R0805]  48.11,138.81 90 top
R136  100k  [R0805]  45.57,138.81 90 top
R137  220  [R0805]  27.79,181.73 270 top
R138  1k8  [R0805]  41.76,176.65 270 top
R139  1k8  [R0805]  41.76,181.73 90 top
R140  220  [R0805]  22.71,181.73 270 top
R141  220  [R0805]  25.25,181.73 270 top
R142  1k  [R0805]  70.97,207.39 180 top
R143  1k  [R0805]  69.45,192.66 180 top
R144  1k  [R0805]  87.99,192.66 0 top
R145  1k  [R0805]  87.99,207.39 0 top
R146  10k/0.1%  [R0805]  68.43,203.83 90 top
R147  10k/0.1%  [R0805]  68.43,196.21 270 top
R148  10k/0.1%  [R0805]  90.78,196.21 270 top
R149  10k/0.1%  [R0805]  90.78,203.83 90 top
R150  10k/0.1%  [R0805]  70.97,203.83 90 top
R151  10k/0.1%  [R0805]  70.97,196.21 270 top
R152  10k/0.1%  [R0805]  87.99,196.21 270 top
R153  10k/0.1%  [R0805]  87.99,203.83 90 top
R154  0r33  [R0805]  135.49,178.69 90 top
R155  1k  [R0805]  135.49,174.11 270 top
R156  3k  [R0805]  131.93,174.11 0 top
R157  1k  [R0805]  74.78,184.27 90 top
R158  1k  [R0805]  74.78,179.19 270 top
R159  1k  [R0805]  74.78,174.11 270 top
R160  1k  [R0805]  87.48,179.19 90 top
R161  1k  [R0805]  87.48,184.27 90 top
R162  1k  [R0805]  48.11,181.73 270 top
R163  1k  [R0805]  133.84,183.38 0 top
R164  10k  [R0805]  153.14,201.67 0 top
R165  1k  [R0805]  153.14,204.21 180 top
R166  10k  [R0805]  153.14,206.75 180 top
R167  100k  [R0805]  45.57,181.73 270 top
R168  1k  [R0805]  87.48,174.88 270 top
R169  1k  [R0805]  48.11,176.65 90 top
R170  100k  [R0805]  45.57,176.65 90 top
RSIN  [1X01]  159.87,34.16 0 top
RSIN1  [1X01]  159.87,72.01 0 top
RSIN2  [1X01]  159.87,109.85 0 top
RSIN3  [1X01]  159.87,147.7 0 top
RSIN4  [1X01]  159.87,185.54 0 top
RSOUT  [1X01]  149.71,34.16 90 top
RSOUT1  [1X01]  149.71,72.01 90 top
RSOUT2  [1X01]  149.71,109.85 90 top
RSOUT3  [1X01]  149.71,147.7 90 top
RSOUT4  [1X01]  149.71,185.54 90 top
RX  [1X01]  147.17,31.62 90 top
RX1  [1X01]  147.17,69.47 90 top
RX2  [1X01]  147.17,107.31 90 top
RX3  [1X01]  147.17,145.16 90 top
RX4  [1X01]  147.17,183 90 top
SCL  [1X01]  154.79,31.62 90 top
SCL1  [1X01]  154.79,69.47 90 top
SCL2  [1X01]  154.79,107.31 90 top
SCL3  [1X01]  154.79,145.16 90 top
SCL4  [1X01]  154.79,183 90 top
SDA  [1X01]  157.33,34.16 90 top
SDA1  [1X01]  157.33,72.01 90 top
SDA2  [1X01]  157.33,109.85 90 top
SDA3  [1X01]  157.33,147.7 90 top
SDA4  [1X01]  157.33,185.54 90 top
TX  [1X01]  147.17,34.16 90 top
TX1  [1X01]  147.17,72.01 90 top
TX2  [1X01]  147.17,109.85 90 top
TX3  [1X01]  147.17,147.7 90 top
TX4  [1X01]  147.17,185.54 90 top

## Library data of the parts
5V 5V1-5V4 5V. 5V.1-5V.4 BT+ BT+1-BT+4 BT- BT-1-BT-4 CKOUT CKOUT1-CKOUT4 CLKIN CLKIN1-CLKIN4 G1-G20 GD1-GD20 OFFSW OFFSW1-OFFSW4 PWRCTL PWRCTL1-PWRCTL4 RSIN RSIN1-RSIN4 RSOUT RSOUT1-RSOUT4 RX RX1-RX4 SCL SCL1-SCL4 SDA SDA1-SDA4 TX TX1-TX4 = pinhead
AUXI AUXI1-AUXI4 AUXO AUXO1-AUXO4 CKI CKI1-CKI4 CKO CKO1-CKO4 CVA CVA1-CVA4 CVB CVB1-CVB4 CVC CVC1-CVC4 CVD CVD1-CVD4 GT1-GT20 = thonkiconn
C1-C110 R1-R170 = rcl
D1-D5 D9 D11 D12 D14 D15 D17 D19 D20 D22 D23 D25 D27 D28 D30 D31 D33 D35 D36 D38 D39 = jasons_stuff
D6-D8 D10 D13 D16 D18 D21 D24 D26 D29 D32 D34 D37 D40 = diode
DC DC1-DC4 IC2 IC3 IC5 IC7 IC8 IC11-IC13 IC15 IC16 IC19-IC21 IC23 IC24 IC27-IC29 IC31 IC32 IC35-IC37 IC39 IC40 L2 L4 L6 L8 L10 MIDIIN MIDIIN1-MIDIIN4 MIDIOUT MIDIOUT1-MIDIOUT4 = jason_eagle6
E$1-E$3 = adafruit
IC1 IC10 IC18 IC26 IC34 = optocoupler; MF: VISHAY/TELEFUNKEN; MPN: 6N138; OC_FARNELL: 9860150; OC_NEWARK: 35K5294
IC4 IC9 IC17 IC25 IC33 = linear
IC6 IC14 IC22 IC30 IC38 = 45xx
L1 L3 L5 L7 L9 = SparkFun
OFF OFF1-OFF4 ON ON1-ON4 = switch-omron; MPN: B3F-1000; OC_FARNELL: 176432; OC_NEWARK: 36M3542
PWR PWR1-PWR4 = led

## Nets
+5V: 5V.1 5V..1 C1.1 C4.+ C8.1 C18.1 C19.+ D3.A D4.A D6.A IC1.8 IC2.5 IC3.1 IC5.1 IC6.1 IC6.13 L1.2 R1.2 R4.2 R28.1
+5V1: 5V1.1 5V.1.1 C24.1 C30.+ C31.1 C33.+ C34.1 D10.A D11.A D14.A IC10.8 IC11.1 IC13.1 IC14.1 IC14.13 IC16.5 L3.2 R37.2 R38.2 R61.1
+5V2: 5V2.1 5V.2.1 C46.1 C52.+ C53.1 C55.+ C56.1 D18.A D19.A D22.A IC18.8 IC19.1 IC21.1 IC22.1 IC22.13 IC24.5 L5.2 R71.2 R72.2 R95.1
+5V3: 5V3.1 5V.3.1 C68.1 C74.+ C75.1 C77.+ C78.1 D26.A D27.A D30.A IC26.8 IC27.1 IC29.1 IC30.1 IC30.13 IC32.5 L7.2 R105.2 R106.2 R129.1
+5V4: 5V4.1 5V.4.1 C90.1 C96.+ C97.1 C99.+ C100.1 D34.A D35.A D38.A IC34.8 IC35.1 IC37.1 IC38.1 IC38.13 IC40.5 L9.2 R139.2 R140.2 R163.1
+9V: C14.1 C22.+ IC4.4 IC7.6 IC8.5 IC8.6 R29.1
+9V1: C23.1 C25.+ IC9.4 IC12.6 IC15.5 IC15.6 R52.1
+9V2: C45.1 C47.+ IC17.4 IC20.6 IC23.5 IC23.6 R86.1
+9V3: C67.1 C69.+ IC25.4 IC28.6 IC31.5 IC31.6 R120.1
+9V4: C89.1 C91.+ IC33.4 IC36.6 IC39.5 IC39.6 R154.1
+10V: C2.+ C9.2 D6.C IC3.5 IC6.16
+10V1: C29.+ C32.2 D10.C IC13.5 IC14.16
+10V2: C51.+ C54.2 D18.C IC21.5 IC22.16
+10V3: C73.+ C76.2 D26.C IC29.5 IC30.16
+10V4: C95.+ C98.2 D34.C IC37.5 IC38.16
AUXGATE: IC6.9 RSOUT.1
AUXGATE1: IC14.9 RSOUT1.1
AUXGATE2: IC22.9 RSOUT2.1
AUXGATE3: IC30.9 RSOUT3.1
AUXGATE4: IC38.9 RSOUT4.1
CLKOUT: CKOUT.1 IC6.3
CLKOUT1: CKOUT1.1 IC14.3
CLKOUT2: CKOUT2.1 IC22.3
CLKOUT3: CKOUT3.1 IC30.3
CLKOUT4: CKOUT4.1 IC38.3
GATE1: G3.1 IC6.14
GATE2: G2.1 IC6.5
GATE3: G1.1 IC6.7
GATE4: G4.1 IC6.11
GATE5: G5.1 IC14.14
GATE6: G6.1 IC14.5
GATE7: G7.1 IC14.7
GATE8: G8.1 IC14.11
GATE9: G9.1 IC22.14
GATE10: G10.1 IC22.5
GATE11: G11.1 IC22.7
GATE12: G12.1 IC22.11
GATE13: G13.1 IC30.14
GATE14: G14.1 IC30.5
GATE15: G15.1 IC30.7
GATE16: G16.1 IC30.11
GATE17: G17.1 IC38.14
GATE18: G18.1 IC38.5
GATE19: G19.1 IC38.7
GATE20: G20.1 IC38.11
GND: AUXI.P$3 AUXO.P$3 BT-.1 C1.2 C2.- C4.- C5.1 C6.1 C7.1 C8.2 C9.1 C10.1 C11.1 C12.1 C14.2 C18.2 C19.- C20.- C21.2 C22.- CKI.P$3 CKO.P$3 CVA.P$3 CVB.P$3 CVC.P$3 CVD.P$3 D2.C D5.C D7.A DC.PIN GD1.1 GD2.1 GD3.1 GD4.1 GT1.P$3 GT2.P$3 GT3.P$3 GT4.P$3 IC1.5 IC2.2 IC3.2 IC3.4 IC4.11 IC5.4 IC5.10 IC6.8 IC7.4 IC8.1 MIDIOUT.P$3 OFF.3 ON.3 PWR.K R5.2 R6.1 R8.1 R18.1 R20.1 R22.1 R26.1 R30.1 R32.1
GND1: AUXI1.P$3 AUXO1.P$3 BT-1.1 C23.2 C24.2 C25.- C26.2 C27.- C29.- C30.- C31.2 C32.1 C33.- C34.2 C39.1 C40.1 C41.1 C42.1 C43.1 C44.1 CKI1.P$3 CKO1.P$3 CVA1.P$3 CVB1.P$3 CVC1.P$3 CVD1.P$3 D12.C D15.C D16.A DC1.PIN GD5.1 GD6.1 GD7.1 GD8.1 GT5.P$3 GT6.P$3 GT7.P$3 GT8.P$3 IC9.11 IC10.5 IC11.4 IC11.10 IC12.4 IC13.2 IC13.4 IC14.8 IC15.1 IC16.2 MIDIOUT1.P$3 OFF1.3 ON1.3 PWR1.K R36.2 R48.1 R49.1 R50.1 R51.1 R53.1 R64.1 R65.1 R68.1
GND2: AUXI2.P$3 AUXO2.P$3 BT-2.1 C45.2 C46.2 C47.- C48.2 C49.- C51.- C52.- C53.2 C54.1 C55.- C56.2 C61.1 C62.1 C63.1 C64.1 C65.1 C66.1 CKI2.P$3 CKO2.P$3 CVA2.P$3 CVB2.P$3 CVC2.P$3 CVD2.P$3 D20.C D23.C D24.A DC2.PIN GD9.1 GD10.1 GD11.1 GD12.1 GT9.P$3 GT10.P$3 GT11.P$3 GT12.P$3 IC17.11 IC18.5 IC19.4 IC19.10 IC20.4 IC21.2 IC21.4 IC22.8 IC23.1 IC24.2 MIDIOUT2.P$3 OFF2.3 ON2.3 PWR2.K R70.2 R82.1 R83.1 R84.1 R85.1 R87.1 R98.1 R99.1 R102.1
GND3: AUXI3.P$3 AUXO3.P$3 BT-3.1 C67.2 C68.2 C69.- C70.2 C71.- C73.- C74.- C75.2 C76.1 C77.- C78.2 C83.1 C84.1 C85.1 C86.1 C87.1 C88.1 CKI3.P$3 CKO3.P$3 CVA3.P$3 CVB3.P$3 CVC3.P$3 CVD3.P$3 D28.C D31.C D32.A DC3.PIN GD13.1 GD14.1 GD15.1 GD16.1 GT13.P$3 GT14.P$3 GT15.P$3 GT16.P$3 IC25.11 IC26.5 IC27.4 IC27.10 IC28.4 IC29.2 IC29.4 IC30.8 IC31.1 IC32.2 MIDIOUT3.P$3 OFF3.3 ON3.3 PWR3.K R104.2 R116.1 R117.1 R118.1 R119.1 R121.1 R132.1 R133.1 R136.1
GND4: AUXI4.P$3 AUXO4.P$3 BT-4.1 C89.2 C90.2 C91.- C92.2 C93.- C95.- C96.- C97.2 C98.1 C99.- C100.2 C105.1 C106.1 C107.1 C108.1 C109.1 C110.1 CKI4.P$3 CKO4.P$3 CVA4.P$3 CVB4.P$3 CVC4.P$3 CVD4.P$3 D36.C D39.C D40.A DC4.PIN GD17.1 GD18.1 GD19.1 GD20.1 GT17.P$3 GT18.P$3 GT19.P$3 GT20.P$3 IC33.11 IC34.5 IC35.4 IC35.10 IC36.4 IC37.2 IC37.4 IC38.8 IC39.1 IC40.2 MIDIOUT4.P$3 OFF4.3 ON4.3 PWR4.K R138.2 R150.1 R151.1 R152.1 R153.1 R155.1 R166.1 R167.1 R170.1
MIDI_IN: IC1.6 R4.1 RX.1
MIDI_IN1: IC10.6 R37.1 RX1.1
MIDI_IN2: IC18.6 R71.1 RX2.1
MIDI_IN3: IC26.6 R105.1 RX3.1
MIDI_IN4: IC34.6 R139.1 RX4.1
MIDI_OUT: R2.2 TX.1
MIDI_OUT1: R39.2 TX1.1
MIDI_OUT2: R73.2 TX2.1
MIDI_OUT3: R107.2 TX3.1
MIDI_OUT4: R141.2 TX4.1
N$1: MIDIOUT.P$2 R1.1
N$2: D1.A IC1.2 R3.2
N$3: IC4.3 IC5.7
N$4: D1.C IC1.3 MIDIIN.P$1
N$5: IC1.7 R5.1
N$6: MIDIOUT.P$1 R2.1
N$7: MIDIIN.P$2 R3.1
N$8: CVC.P$1 R16.2 R17.2
N$9: CVD.P$1 R25.2 R27.2
N$10: CVB.P$1 R19.2 R21.2
N$11: CVA.P$1 R23.2 R24.2
N$12: C13.2 IC4.1 R16.1
N$13: C15.2 IC4.7 R27.1
N$14: C17.2 IC4.8 R24.1
N$15: C16.2 IC4.14 R19.1
N$16: BT+.1 DC.NC
N$17: C16.1 IC4.13 R20.2 R21.1
N$18: C17.1 IC4.9 R22.2 R23.1
N$19: IC6.10 R15.1
N$20: C15.1 IC4.6 R25.1 R26.2
N$21: D9.A IC10.2 R35.2
N$22: C13.1 IC4.2 R17.1 R18.2
N$23: CLKIN.1 IC2.6
N$24: AUXI.P$1 R8.2 R9.2
N$25: IC2.4 RSIN.1
N$26: D4.C D5.A IC2.3 R9.1
N$27: C12.2 GT2.P$1 R15.2
N$28: D9.C IC10.3 MIDIIN1.P$1
N$29: IC4.5 IC5.6
N$30: IC4.10 IC5.9
N$31: IC4.12 IC5.8
N$32: IC7.1 IC7.7 IC7.8 R29.2
N$33: IC7.5 R30.2 R31.2
N$34: C21.1 IC7.3
N$35: D7.C IC7.2 L2.2
N$36: D8.A DC.BARREL
N$37: IC6.2 R10.1
N$38: C3.+ IC3.6
N$39: C3.- IC3.3
N$40: IC6.4 R11.1
N$41: IC6.6 R12.1
N$42: IC10.7 R36.1
N$43: IC6.12 R14.1
N$44: AUXO.P$1 C5.2 R10.2
N$45: C6.2 CKO.P$1 R11.2
N$46: C7.2 GT1.P$1 R12.2
N$47: C11.2 GT4.P$1 R14.2
N$48: C10.2 GT3.P$1 R13.2
N$49: IC6.15 R13.1
N$50: MIDIOUT1.P$1 R39.1
N$51: C20.+ L1.1 L2.1 R31.1
N$52: CVC1.P$1 R40.2 R44.2
N$53: D2.A D3.C IC2.1 R7.1
N$54: CKI.P$1 R6.2 R7.2
N$55: CVD1.P$1 R41.2 R45.2
N$56: PWR.A R28.2
N$57: C35.2 IC9.1 R40.1
N$58: C36.2 IC9.7 R41.1
N$59: C37.2 IC9.8 R42.1
N$60: C38.2 IC9.14 R43.1
N$61: IC8.4 IC8.7 IC8.8 ON.2 R34.2
N$62: IC8.2 R32.2 R33.2
N$63: C38.1 IC9.13 R47.1 R51.2
N$64: C37.1 IC9.9 R46.1 R50.2
N$65: C36.1 IC9.6 R45.1 R49.2
N$66: C35.1 IC9.2 R44.1 R48.2
N$67: IC9.10 IC11.9
N$68: IC9.12 IC11.8
N$69: IC12.1 IC12.7 IC12.8 R52.2
N$70: C26.1 IC12.3
N$71: D16.C IC12.2 L4.2
N$72: IC12.5 R53.2 R54.2
N$73: C28.+ IC13.6
N$74: C28.- IC13.3
N$75: D13.A DC1.BARREL
N$76: CVB1.P$1 R43.2 R47.2
N$77: CVA1.P$1 R42.2 R46.2
N$78: IC14.2 R55.1
N$79: IC14.4 R56.1
N$80: IC14.6 R57.1
N$81: IC14.12 R58.1
N$82: AUXO1.P$1 C39.2 R55.2
N$83: C40.2 CKO1.P$1 R56.2
N$84: C41.2 GT6.P$1 R57.2
N$85: C42.2 GT7.P$1 R58.2
N$86: C43.2 GT8.P$1 R59.2
N$87: IC14.15 R59.1
N$88: D11.C D12.A IC16.1 R60.1
N$89: CKI1.P$1 R60.2 R65.2
N$90: PWR1.A R61.2
N$91: IC15.4 IC15.7 IC15.8 ON1.2 R62.2
N$92: IC15.2 R63.2 R64.2
N$93: IC9.3 IC11.7
N$94: IC9.5 IC11.6
N$95: C27.+ L3.1 L4.1 R54.1
N$96: MIDIIN1.P$2 R35.1
N$97: MIDIOUT1.P$2 R38.1
N$98: BT+1.1 DC1.NC
N$99: IC14.10 R66.1
N$100: AUXI1.P$1 R67.2 R68.2
N$101: D14.C D15.A IC16.3 R67.1
N$102: IC16.4 RSIN1.1
N$103: CLKIN1.1 IC16.6
N$104: C44.2 GT5.P$1 R66.2
N$105: D17.A IC18.2 R69.2
N$106: D17.C IC18.3 MIDIIN2.P$1
N$107: IC18.7 R70.1
N$108: MIDIOUT2.P$1 R73.1
N$109: CVC2.P$1 R74.2 R78.2
N$110: CVD2.P$1 R75.2 R79.2
N$111: C57.2 IC17.1 R74.1
N$112: C58.2 IC17.7 R75.1
N$113: C59.2 IC17.8 R76.1
N$114: C60.2 IC17.14 R77.1
N$115: C60.1 IC17.13 R81.1 R85.2
N$116: C59.1 IC17.9 R80.1 R84.2
N$117: C58.1 IC17.6 R79.1 R83.2
N$118: C57.1 IC17.2 R78.1 R82.2
N$119: IC17.10 IC19.9
N$120: IC17.12 IC19.8
N$121: IC20.1 IC20.7 IC20.8 R86.2
N$122: C48.1 IC20.3
N$123: D24.C IC20.2 L6.2
N$124: IC20.5 R87.2 R88.2
N$125: C50.+ IC21.6
N$126: C50.- IC21.3
N$127: D21.A DC2.BARREL
N$128: CVB2.P$1 R77.2 R81.2
N$129: CVA2.P$1 R76.2 R80.2
N$130: IC22.2 R89.1
N$131: IC22.4 R90.1
N$132: IC22.6 R91.1
N$133: IC22.12 R92.1
N$134: AUXO2.P$1 C61.2 R89.2
N$135: C62.2 CKO2.P$1 R90.2
N$136: C63.2 GT10.P$1 R91.2
N$137: C64.2 GT11.P$1 R92.2
N$138: C65.2 GT12.P$1 R93.2
N$139: IC22.15 R93.1
N$140: D19.C D20.A IC24.1 R94.1
N$141: CKI2.P$1 R94.2 R99.2
N$142: PWR2.A R95.2
N$143: IC23.4 IC23.7 IC23.8 ON2.2 R96.2
N$144: IC23.2 R97.2 R98.2
N$145: IC17.3 IC19.7
N$146: IC17.5 IC19.6
N$147: C49.+ L5.1 L6.1 R88.1
N$148: MIDIIN2.P$2 R69.1
N$149: MIDIOUT2.P$2 R72.1
N$150: BT+2.1 DC2.NC
N$151: IC22.10 R100.1
N$152: AUXI2.P$1 R101.2 R102.2
N$153: D22.C D23.A IC24.3 R101.1
N$154: IC24.4 RSIN2.1
N$155: CLKIN2.1 IC24.6
N$156: C66.2 GT9.P$1 R100.2
N$157: D25.A IC26.2 R103.2
N$158: D25.C IC26.3 MIDIIN3.P$1
N$159: IC26.7 R104.1
N$160: MIDIOUT3.P$1 R107.1
N$161: CVC3.P$1 R108.2 R112.2
N$162: CVD3.P$1 R109.2 R113.2
N$163: C79.2 IC25.1 R108.1
N$164: C80.2 IC25.7 R109.1
N$165: C81.2 IC25.8 R110.1
N$166: C82.2 IC25.14 R111.1
N$167: C82.1 IC25.13 R115.1 R119.2
N$168: C81.1 IC25.9 R114.1 R118.2
N$169: C80.1 IC25.6 R113.1 R117.2
N$170: C79.1 IC25.2 R112.1 R116.2
N$171: IC25.10 IC27.9
N$172: IC25.12 IC27.8
N$173: IC28.1 IC28.7 IC28.8 R120.2
N$174: C70.1 IC28.3
N$175: D32.C IC28.2 L8.2
N$176: IC28.5 R121.2 R122.2
N$177: C72.+ IC29.6
N$178: C72.- IC29.3
N$179: D29.A DC3.BARREL
N$180: CVB3.P$1 R111.2 R115.2
N$181: CVA3.P$1 R110.2 R114.2
N$182: IC30.2 R123.1
N$183: IC30.4 R124.1
N$184: IC30.6 R125.1
N$185: IC30.12 R126.1
N$186: AUXO3.P$1 C83.2 R123.2
N$187: C84.2 CKO3.P$1 R124.2
N$188: C85.2 GT14.P$1 R125.2
N$189: C86.2 GT15.P$1 R126.2
N$190: C87.2 GT16.P$1 R127.2
N$191: IC30.15 R127.1
N$192: D27.C D28.A IC32.1 R128.1
N$193: CKI3.P$1 R128.2 R133.2
N$194: PWR3.A R129.2
N$195: IC31.4 IC31.7 IC31.8 ON3.2 R130.2
N$196: IC31.2 R131.2 R132.2
N$197: IC25.3 IC27.7
N$198: IC25.5 IC27.6
N$199: C71.+ L7.1 L8.1 R122.1
N$200: MIDIIN3.P$2 R103.1
N$201: MIDIOUT3.P$2 R106.1
N$202: BT+3.1 DC3.NC
N$203: IC30.10 R134.1
N$204: AUXI3.P$1 R135.2 R136.2
N$205: D30.C D31.A IC32.3 R135.1
N$206: IC32.4 RSIN3.1
N$207: CLKIN3.1 IC32.6
N$208: C88.2 GT13.P$1 R134.2
N$209: D33.A IC34.2 R137.2
N$210: D33.C IC34.3 MIDIIN4.P$1
N$211: IC34.7 R138.1
N$212: MIDIOUT4.P$1 R141.1
N$213: CVC4.P$1 R142.2 R146.2
N$214: CVD4.P$1 R143.2 R147.2
N$215: C101.2 IC33.1 R142.1
N$216: C102.2 IC33.7 R143.1
N$217: C103.2 IC33.8 R144.1
N$218: C104.2 IC33.14 R145.1
N$219: C104.1 IC33.13 R149.1 R153.2
N$220: C103.1 IC33.9 R148.1 R152.2
N$221: C102.1 IC33.6 R147.1 R151.2
N$222: C101.1 IC33.2 R146.1 R150.2
N$223: IC33.10 IC35.9
N$224: IC33.12 IC35.8
N$225: IC36.1 IC36.7 IC36.8 R154.2
N$226: C92.1 IC36.3
N$227: D40.C IC36.2 L10.2
N$228: IC36.5 R155.2 R156.2
N$229: C94.+ IC37.6
N$230: C94.- IC37.3
N$231: D37.A DC4.BARREL
N$232: CVB4.P$1 R145.2 R149.2
N$233: CVA4.P$1 R144.2 R148.2
N$234: IC38.2 R157.1
N$235: IC38.4 R158.1
N$236: IC38.6 R159.1
N$237: IC38.12 R160.1
N$238: AUXO4.P$1 C105.2 R157.2
N$239: C106.2 CKO4.P$1 R158.2
N$240: C107.2 GT18.P$1 R159.2
N$241: C108.2 GT19.P$1 R160.2
N$242: C109.2 GT20.P$1 R161.2
N$243: IC38.15 R161.1
N$244: D35.C D36.A IC40.1 R162.1
N$245: CKI4.P$1 R162.2 R167.2
N$246: PWR4.A R163.2
N$247: IC39.4 IC39.7 IC39.8 ON4.2 R164.2
N$248: IC39.2 R165.2 R166.2
N$249: IC33.3 IC35.7
N$250: IC33.5 IC35.6
N$251: C93.+ L9.1 L10.1 R156.1
N$252: MIDIIN4.P$2 R137.1
N$253: MIDIOUT4.P$2 R140.1
N$254: BT+4.1 DC4.NC
N$255: IC38.10 R168.1
N$256: AUXI4.P$1 R169.2 R170.2
N$257: D38.C D39.A IC40.3 R169.1
N$258: IC40.4 RSIN4.1
N$259: CLKIN4.1 IC40.6
N$260: C110.2 GT17.P$1 R168.2
OFF_SW: OFF.2 OFFSW.1
OFF_SW1: OFF1.2 OFFSW1.1
OFF_SW2: OFF2.2 OFFSW2.1
OFF_SW3: OFF3.2 OFFSW3.1
OFF_SW4: OFF4.2 OFFSW4.1
PWR_CTRL: PWRCTL.1 R33.1
PWR_CTRL1: PWRCTL1.1 R63.1
PWR_CTRL2: PWRCTL2.1 R97.1
PWR_CTRL3: PWRCTL3.1 R131.1
PWR_CTRL4: PWRCTL4.1 R165.1
SCL: IC5.2 SCL.1
SCL1: IC11.2 SCL1.1
SCL2: IC19.2 SCL2.1
SCL3: IC27.2 SCL3.1
SCL4: IC35.2 SCL4.1
SDA: IC5.3 SDA.1
SDA1: IC11.3 SDA1.1
SDA2: IC19.3 SDA2.1
SDA3: IC27.3 SDA3.1
SDA4: IC35.3 SDA4.1
VIN: D8.C IC8.3 R34.1
VIN1: D13.C IC15.3 R62.1
VIN2: D21.C IC23.3 R96.1
VIN3: D29.C IC31.3 R130.1
VIN4: D37.C IC39.3 R164.1

## Tracks (layer width: path | path; a pad name or v marks a point on that pad's centre or on a via)
+5V  (via drill 0.6)
  Top 0.254: D4.A 50.53,26.53 49.25,27.81 44.17,27.81 43.66,28.32 43.66,32.76 43.79,32.89 | 43.79,32.89 43.03,32.89 41.76,31.62 | 43.79,32.89 52.94,32.89 53.19,32.64 D3.A | 57.89,24.76 57.89,24.06 C1.1 57.89,23.94 | 41.76,31.62 IC1.8 | R4.2 41.76,31.62 | R28.1 132.88,30.04 132.82,29.97 | R1.2 22.71,26.54 27.79,21.46 34.14,21.46 35.41,22.73
  Top 0.305: IC5.1 75.91,43.29 73.82,41.21 C18.1
  Top 0.406: D6.A 69.32,31.62 69.95,30.98 v69.95,25.65 69.09,25.65 C4.+ 68.45,26.29 | 81.13,28.45 81.13,31.49 80.37,32.26 IC6.1 77.77,32.29 C8.1 77.77,37.52 74.02,41.27 73.58,41.27 C18.1 73.83,41.53 | IC3.1 65.07,26.86 64.62,26.41 v64.62,25.65 | C1.1 v59.79,24 59.79,22.48 59.16,21.84 36.3,21.84 35.41,22.73 35.41,30.35 36.68,31.62 IC1.8 | IC2.5 57,25.65 57.89,24.76 | 41.44,31.62 R4.2 | 5V.1 5V..1 144.63,30.6 144,29.97 132.82,29.97 107.16,29.97 105.83,28.64 L1.2 105.78,27.3 102.34,27.3 v101.2,28.45 101.2,31.61 C19.+ | v79.86,28.45 81.13,28.45 | 81.13,28.45 IC6.13 v85.57,28.45
  Bottom 0.406: v59.79,24 61.45,25.65 v64.62,25.65 v69.95,25.65 75.16,25.65 77.95,28.45 v79.86,28.45 | v85.57,28.45 v101.2,28.45
+5V1  (via drill 0.6)
  Top 0.254: D14.A 50.53,64.38 49.25,65.66 44.17,65.66 43.66,66.16 43.66,70.61 43.79,70.74 | 43.79,70.74 43.03,70.74 41.76,69.47 | 43.79,70.74 52.94,70.74 53.19,70.48 D11.A | 57.89,62.61 57.89,61.91 C34.1 57.89,61.79 | 41.76,69.47 IC10.8 | R37.2 41.76,69.47 | R61.1 132.88,67.88 132.82,67.81 | R38.2 22.71,64.39 27.79,59.31 34.14,59.31 35.41,60.58
  Top 0.305: IC11.1 75.91,81.13 73.82,79.05 C24.1
  Top 0.406: D10.A 69.32,69.47 69.95,68.83 v69.95,63.5 69.09,63.5 C30.+ 68.45,64.13 | 81.13,66.29 81.13,69.34 80.37,70.1 IC14.1 77.77,70.14 C31.1 77.77,75.37 74.02,79.12 73.58,79.12 C24.1 73.83,79.37 | IC13.1 65.07,64.71 64.62,64.26 v64.62,63.5 | C34.1 v59.79,61.85 59.79,60.32 59.16,59.69 36.3,59.69 35.41,60.58 35.41,68.2 36.68,69.47 IC10.8 | IC16.5 57,63.5 57.89,62.61 | 41.44,69.47 R37.2 | 5V1.1 5V.1.1 144.63,68.45 144,67.81 132.82,67.81 107.16,67.81 105.83,66.48 L3.2 105.78,65.15 102.34,65.15 v101.2,66.29 101.2,69.45 C33.+ | v79.86,66.29 81.13,66.29 | 81.13,66.29 IC14.13 v85.57,66.29
  Bottom 0.406: v59.79,61.85 61.45,63.5 v64.62,63.5 v69.95,63.5 75.16,63.5 77.95,66.29 v79.86,66.29 | v85.57,66.29 v101.2,66.29
+5V2  (via drill 0.6)
  Top 0.254: D22.A 50.53,102.22 49.25,103.5 44.17,103.5 43.66,104.01 43.66,108.45 43.79,108.58 | 43.79,108.58 43.03,108.58 41.76,107.31 | 43.79,108.58 52.94,108.58 53.19,108.33 D19.A | 57.89,100.45 57.89,99.75 C56.1 57.89,99.63 | 41.76,107.31 IC18.8 | R71.2 41.76,107.31 | R95.1 132.88,105.73 132.82,105.66 | R72.2 22.71,102.23 27.79,97.15 34.14,97.15 35.41,98.42
  Top 0.305: IC19.1 75.91,118.98 73.82,116.9 C46.1
  Top 0.406: D18.A 69.32,107.31 69.95,106.68 v69.95,101.34 69.09,101.34 C52.+ 68.45,101.98 | 81.13,104.14 81.13,107.19 80.37,107.95 IC22.1 77.77,107.98 C53.1 77.77,113.22 74.02,116.96 73.58,116.96 C46.1 73.83,117.22 | IC21.1 65.07,102.55 64.62,102.11 v64.62,101.34 | C56.1 v59.79,99.69 59.79,98.17 59.16,97.53 36.3,97.53 35.41,98.42 35.41,106.04 36.68,107.31 IC18.8 | IC24.5 57,101.34 57.89,100.45 | 41.44,107.31 R71.2 | 5V2.1 5V.2.1 144.63,106.3 144,105.66 132.82,105.66 107.16,105.66 105.83,104.33 L5.2 105.78,102.99 102.34,102.99 v101.2,104.14 101.2,107.3 C55.+ | v79.86,104.14 81.13,104.14 | 81.13,104.14 IC22.13 v85.57,104.14
  Bottom 0.406: v59.79,99.69 61.45,101.34 v64.62,101.34 v69.95,101.34 75.16,101.34 77.95,104.14 v79.86,104.14 | v85.57,104.14 v101.2,104.14
+5V3  (via drill 0.6)
  Top 0.254: D30.A 50.53,140.07 49.25,141.35 44.17,141.35 43.66,141.86 43.66,146.3 43.79,146.43 | 43.79,146.43 43.03,146.43 41.76,145.16 | 43.79,146.43 52.94,146.43 53.19,146.17 D27.A | 57.89,138.3 57.89,137.6 C78.1 57.89,137.48 | 41.76,145.16 IC26.8 | R105.2 41.76,145.16 | R129.1 132.88,143.57 132.82,143.51 | R106.2 22.71,140.08 27.79,135 34.14,135 35.41,136.27
  Top 0.305: IC27.1 75.91,156.83 73.82,154.74 C68.1
  Top 0.406: D26.A 69.32,145.16 69.95,144.52 v69.95,139.19 69.09,139.19 C74.+ 68.45,139.82 | 81.13,141.98 81.13,145.03 80.37,145.79 IC30.1 77.77,145.83 C75.1 77.77,151.06 74.02,154.81 73.58,154.81 C68.1 73.83,155.06 | IC29.1 65.07,140.4 64.62,139.95 v64.62,139.19 | C78.1 v59.79,137.54 59.79,136.01 59.16,135.38 36.3,135.38 35.41,136.27 35.41,143.89 36.68,145.16 IC26.8 | IC32.5 57,139.19 57.89,138.3 | 41.44,145.16 R105.2 | 5V3.1 5V.3.1 144.63,144.14 144,143.51 132.82,143.51 107.16,143.51 105.83,142.17 L7.2 105.78,140.84 102.34,140.84 v101.2,141.98 101.2,145.14 C77.+ | v79.86,141.98 81.13,141.98 | 81.13,141.98 IC30.13 v85.57,141.98
  Bottom 0.406: v59.79,137.54 61.45,139.19 v64.62,139.19 v69.95,139.19 75.16,139.19 77.95,141.98 v79.86,141.98 | v85.57,141.98 v101.2,141.98
+5V4  (via drill 0.6)
  Top 0.254: D38.A 50.53,177.92 49.25,179.19 44.17,179.19 43.66,179.7 43.66,184.15 43.79,184.27 | 43.79,184.27 43.03,184.27 41.76,183 | 43.79,184.27 52.94,184.27 53.19,184.02 D35.A | 57.89,176.15 57.89,175.44 C100.1 57.89,175.32 | 41.76,183 IC34.8 | R139.2 41.76,183 | R163.1 132.88,181.42 132.82,181.35 | R140.2 22.71,177.92 27.79,172.84 34.14,172.84 35.41,174.11
  Top 0.305: IC35.1 75.91,194.67 73.82,192.59 C90.1
  Top 0.406: D34.A 69.32,183 69.95,182.37 v69.95,177.04 69.09,177.04 C96.+ 68.45,177.67 | 81.13,179.83 81.13,182.88 80.37,183.64 IC38.1 77.77,183.68 C97.1 77.77,188.91 74.02,192.66 73.58,192.66 C90.1 73.83,192.91 | IC37.1 65.07,178.24 64.62,177.8 v64.62,177.04 | C100.1 v59.79,175.38 59.79,173.86 59.16,173.23 36.3,173.23 35.41,174.11 35.41,181.73 36.68,183 IC34.8 | IC40.5 57,177.04 57.89,176.15 | 41.44,183 R139.2 | 5V4.1 5V.4.1 144.63,181.99 144,181.35 132.82,181.35 107.16,181.35 105.83,180.02 L9.2 105.78,178.69 102.34,178.69 v101.2,179.83 101.2,182.99 C99.+ | v79.86,179.83 81.13,179.83 | 81.13,179.83 IC38.13 v85.57,179.83
  Bottom 0.406: v59.79,175.38 61.45,177.04 v64.62,177.04 v69.95,177.04 75.16,177.04 77.95,179.83 v79.86,179.83 | v85.57,179.83 v101.2,179.83
+9V  (via drill 0.6)
  Top 0.406: IC7.6 135.29,26.16 R29.1 135.49,26.29 135.61,26.16 136.63,26.16 137.65,27.18 v137.65,28.19 | IC8.6 IC8.5 v157.46,44.45 | v170.03,32.89 170.03,31.62 171.3,30.35 C22.+
  Top 0.61: C14.1 v74.91,48.64 IC4.4
  Bottom 0.406: v74.91,48.64 93.32,48.64 96.24,45.72 142.09,45.72 | 142.09,45.72 145.9,45.72 147.17,44.45 v157.46,44.45 158.47,44.45 159.36,43.56 168.63,43.56 170.03,42.16 v170.03,32.89 | v137.65,28.19 137.65,36.06 142.09,40.51 142.09,45.72
+9V1  (via drill 0.6)
  Top 0.406: IC12.6 135.29,64 R52.1 135.49,64.13 135.61,64 136.63,64 137.65,65.02 v137.65,66.04 | IC15.6 IC15.5 v157.46,82.29 | v170.03,70.74 170.03,69.47 171.3,68.2 C25.+
  Top 0.61: C23.1 v74.91,86.48 IC9.4
  Bottom 0.406: v74.91,86.48 93.32,86.48 96.24,83.56 142.09,83.56 | 142.09,83.56 145.9,83.56 147.17,82.29 v157.46,82.29 158.47,82.29 159.36,81.4 168.63,81.4 170.03,80.01 v170.03,70.74 | v137.65,66.04 137.65,73.91 142.09,78.36 142.09,83.56
+9V2  (via drill 0.6)
  Top 0.406: IC20.6 135.29,101.85 R86.1 135.49,101.98 135.61,101.85 136.63,101.85 137.65,102.87 v137.65,103.88 | IC23.6 IC23.5 v157.46,120.14 | v170.03,108.58 170.03,107.31 171.3,106.04 C47.+
  Top 0.61: C45.1 v74.91,124.33 IC17.4
  Bottom 0.406: v74.91,124.33 93.32,124.33 96.24,121.41 142.09,121.41 | 142.09,121.41 145.9,121.41 147.17,120.14 v157.46,120.14 158.47,120.14 159.36,119.25 168.63,119.25 170.03,117.85 v170.03,108.58 | v137.65,103.88 137.65,111.76 142.09,116.2 142.09,121.41
+9V3  (via drill 0.6)
  Top 0.406: IC28.6 135.29,139.7 R120.1 135.49,139.82 135.61,139.7 136.63,139.7 137.65,140.71 v137.65,141.73 | IC31.6 IC31.5 v157.46,157.99 | v170.03,146.43 170.03,145.16 171.3,143.89 C69.+
  Top 0.61: C67.1 v74.91,162.18 IC25.4
  Bottom 0.406: v74.91,162.18 93.32,162.18 96.24,159.25 142.09,159.25 | 142.09,159.25 145.9,159.25 147.17,157.99 v157.46,157.99 158.47,157.99 159.36,157.1 168.63,157.1 170.03,155.7 v170.03,146.43 | v137.65,141.73 137.65,149.6 142.09,154.05 142.09,159.25
+9V4  (via drill 0.6)
  Top 0.406: IC36.6 135.29,177.54 R154.1 135.49,177.67 135.61,177.54 136.63,177.54 137.65,178.56 v137.65,179.57 | IC39.6 IC39.5 v157.46,195.83 | v170.03,184.27 170.03,183 171.3,181.73 C91.+
  Top 0.61: C89.1 v74.91,200.02 IC33.4